# Altium PCB ESC_4in1_8layer.PcbDoc (part 1 of 2)
Units mm, origin at the board's own origin, x right, y up, seen from the top; angles counter-clockwise.
Board outline 33 x 33 mm, 8 copper layers (Top Layer, VBAT 1, Signal 1, GND 1, VBAT 2, Signal 2, GND 2, Bottom Layer), stack 1.028 mm thick; 215 components, 149 nets, 833 pads, 210 vias.
Unrouted connection lines stored in the file: 316.
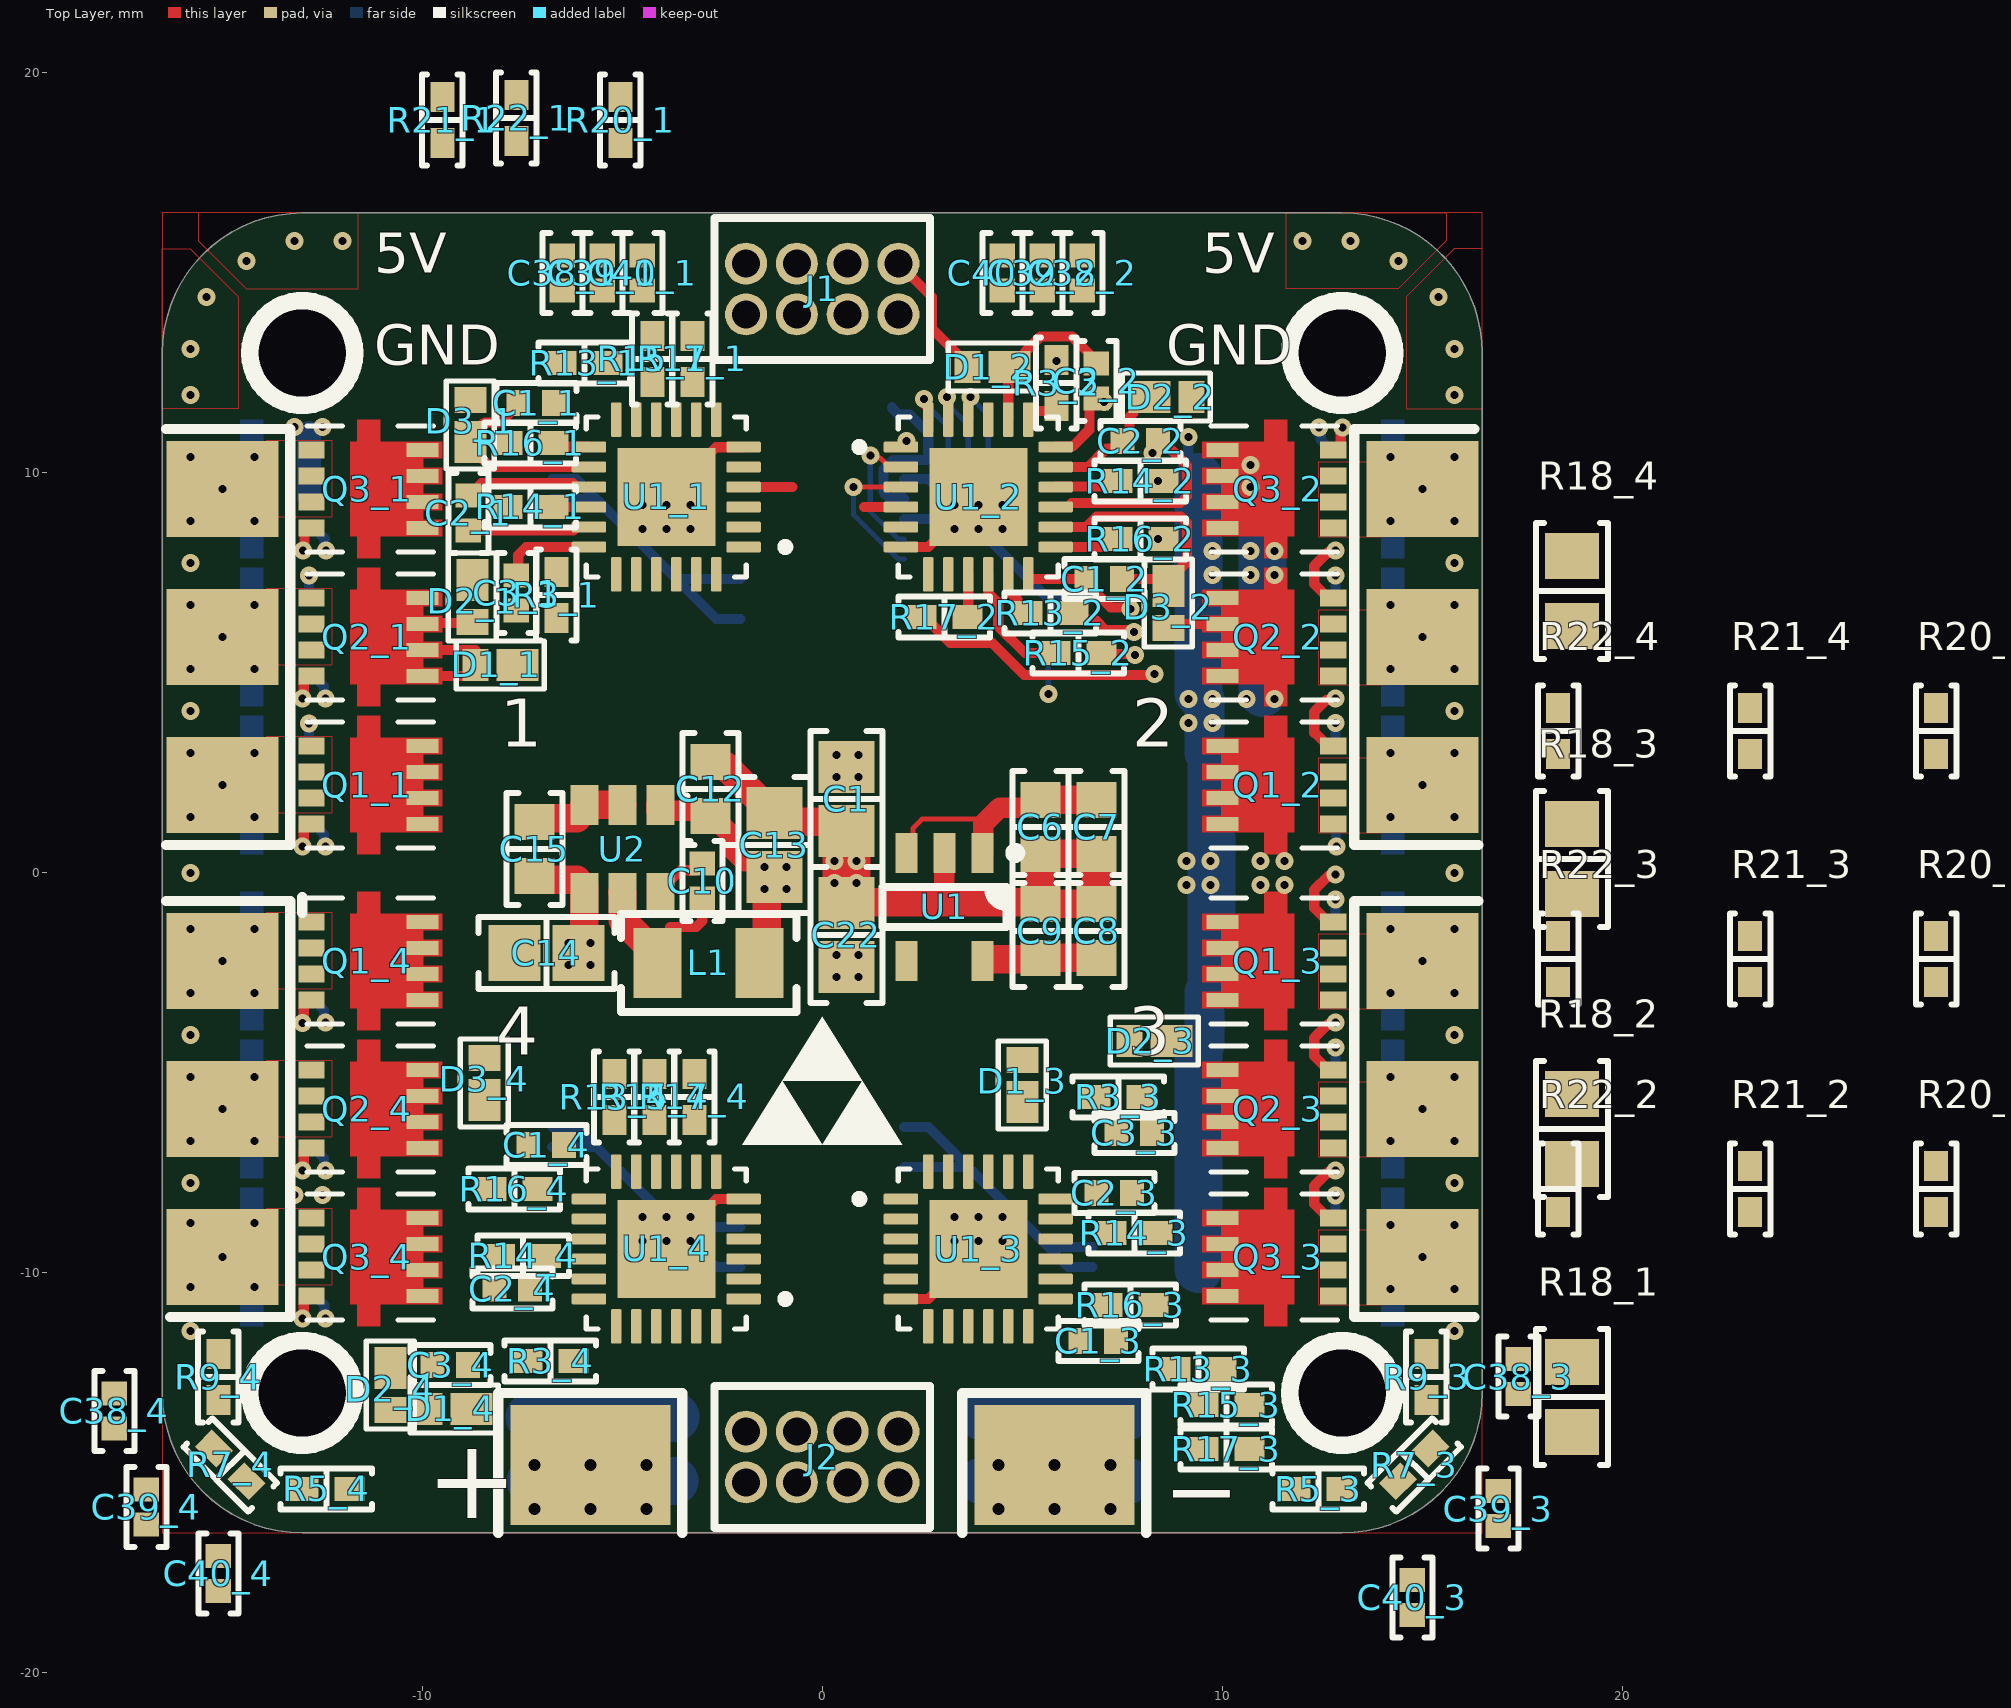
[diagram p0: Top Layer view]
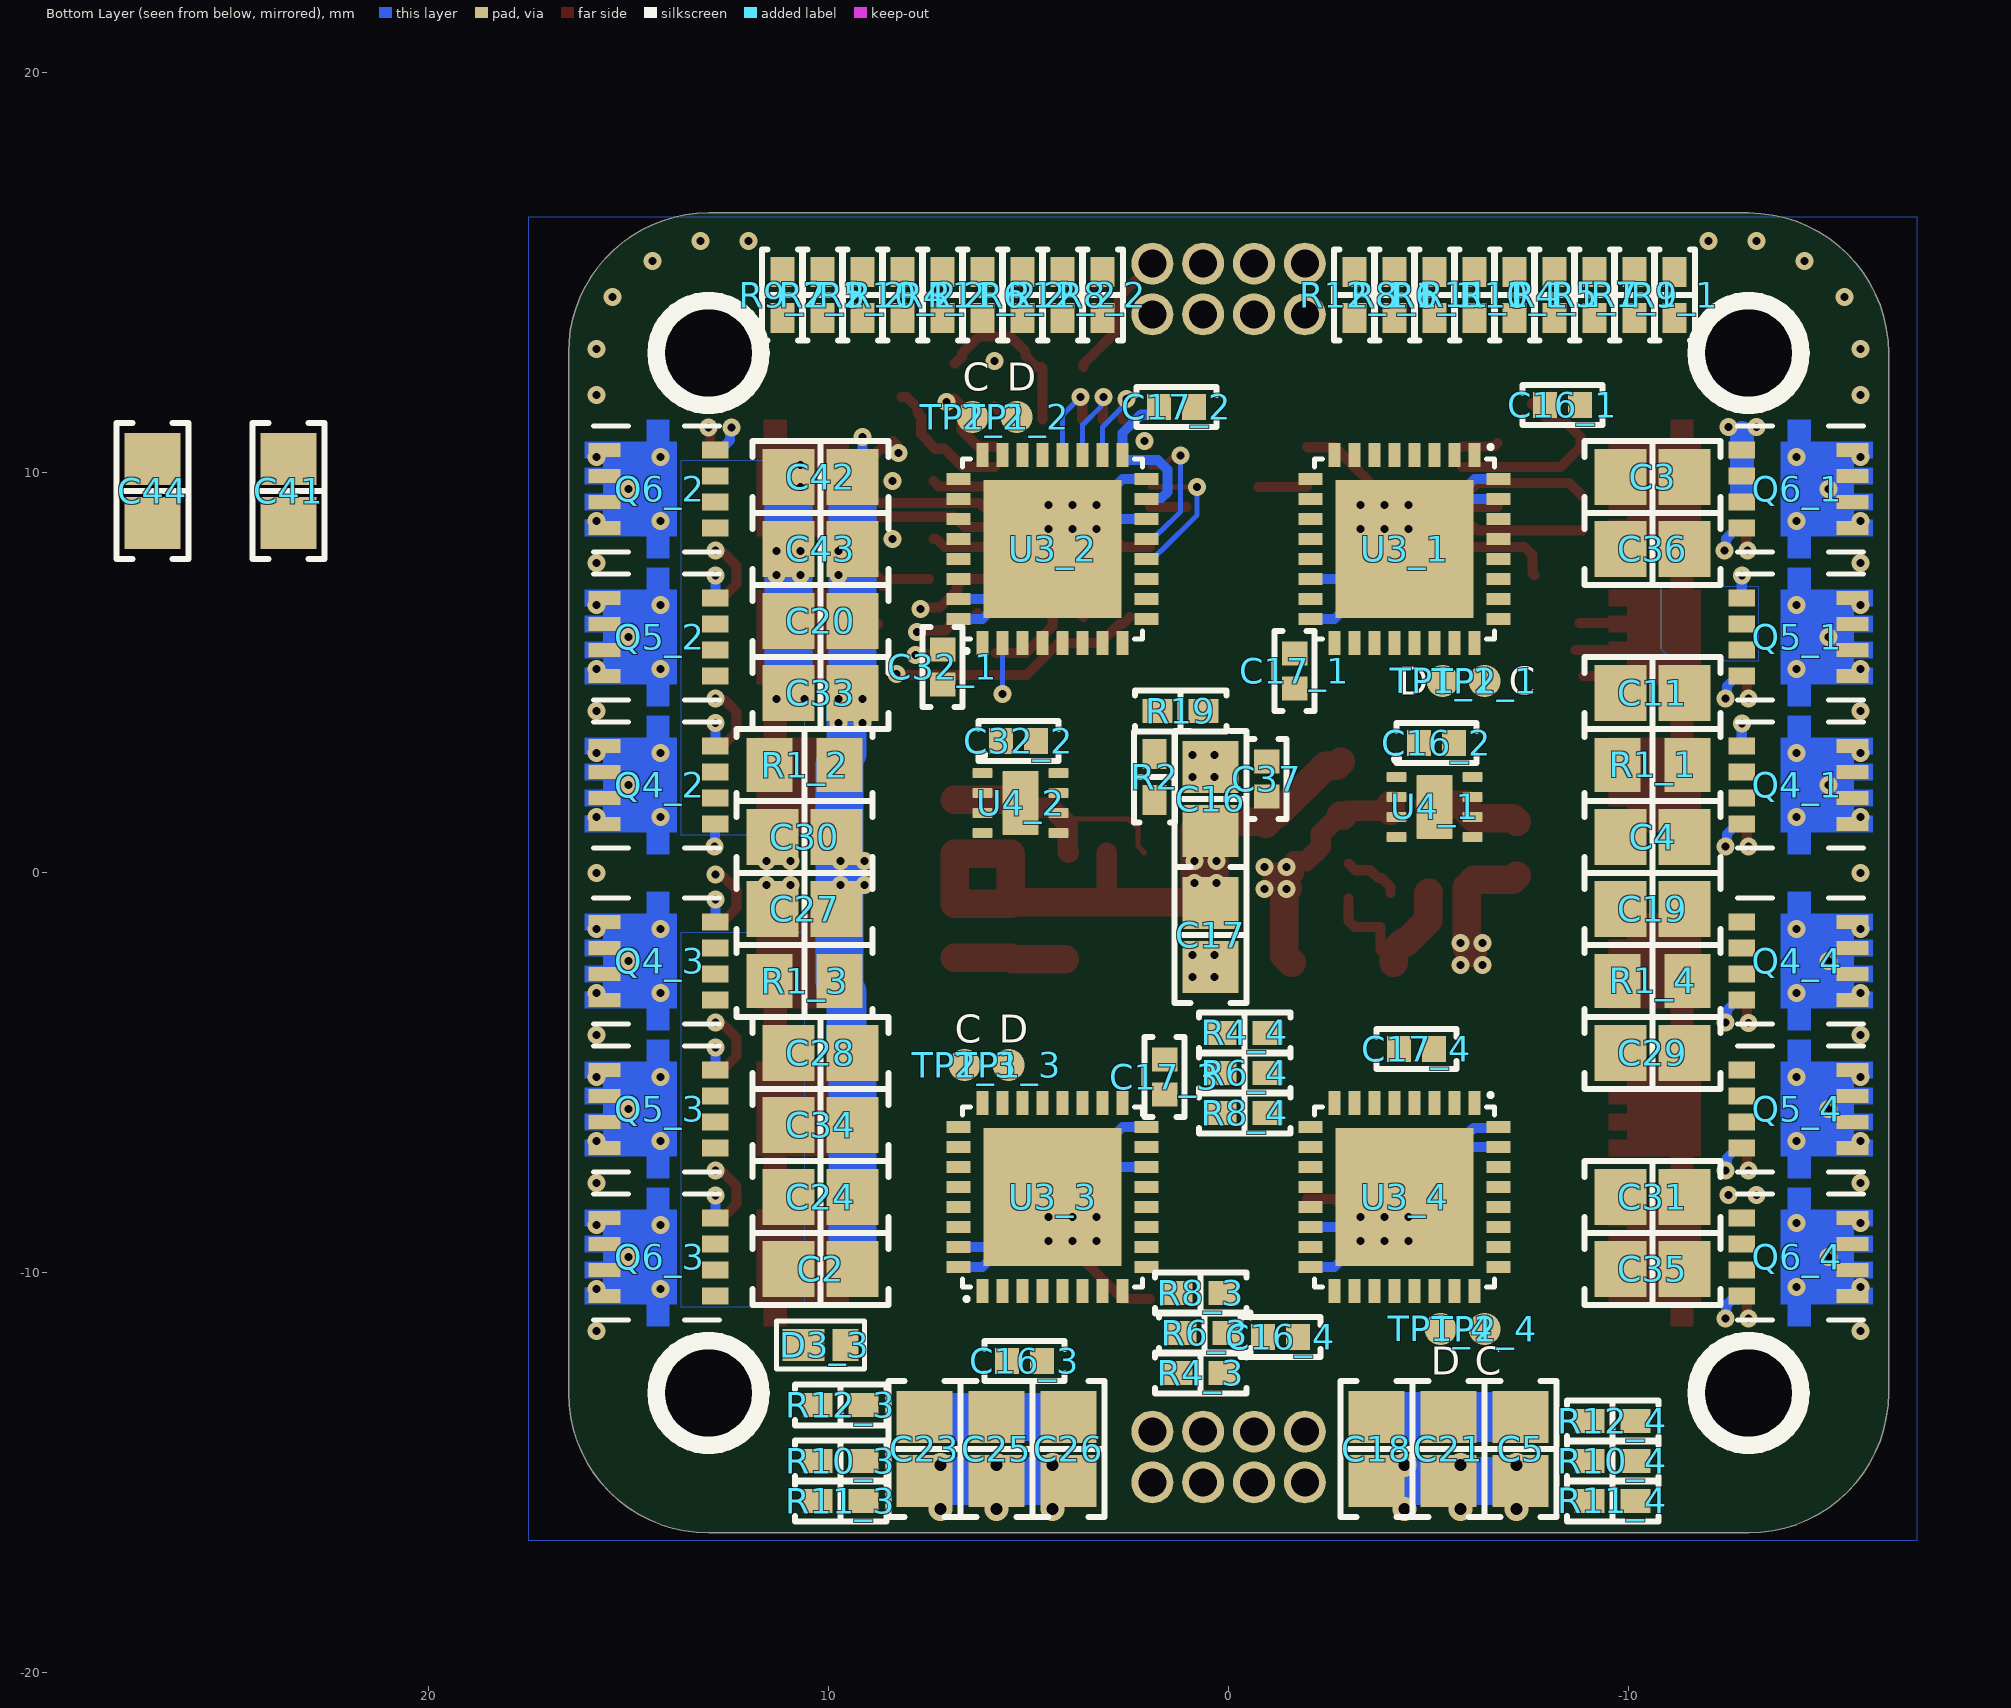
[diagram p1: Bottom Layer view, seen from below]
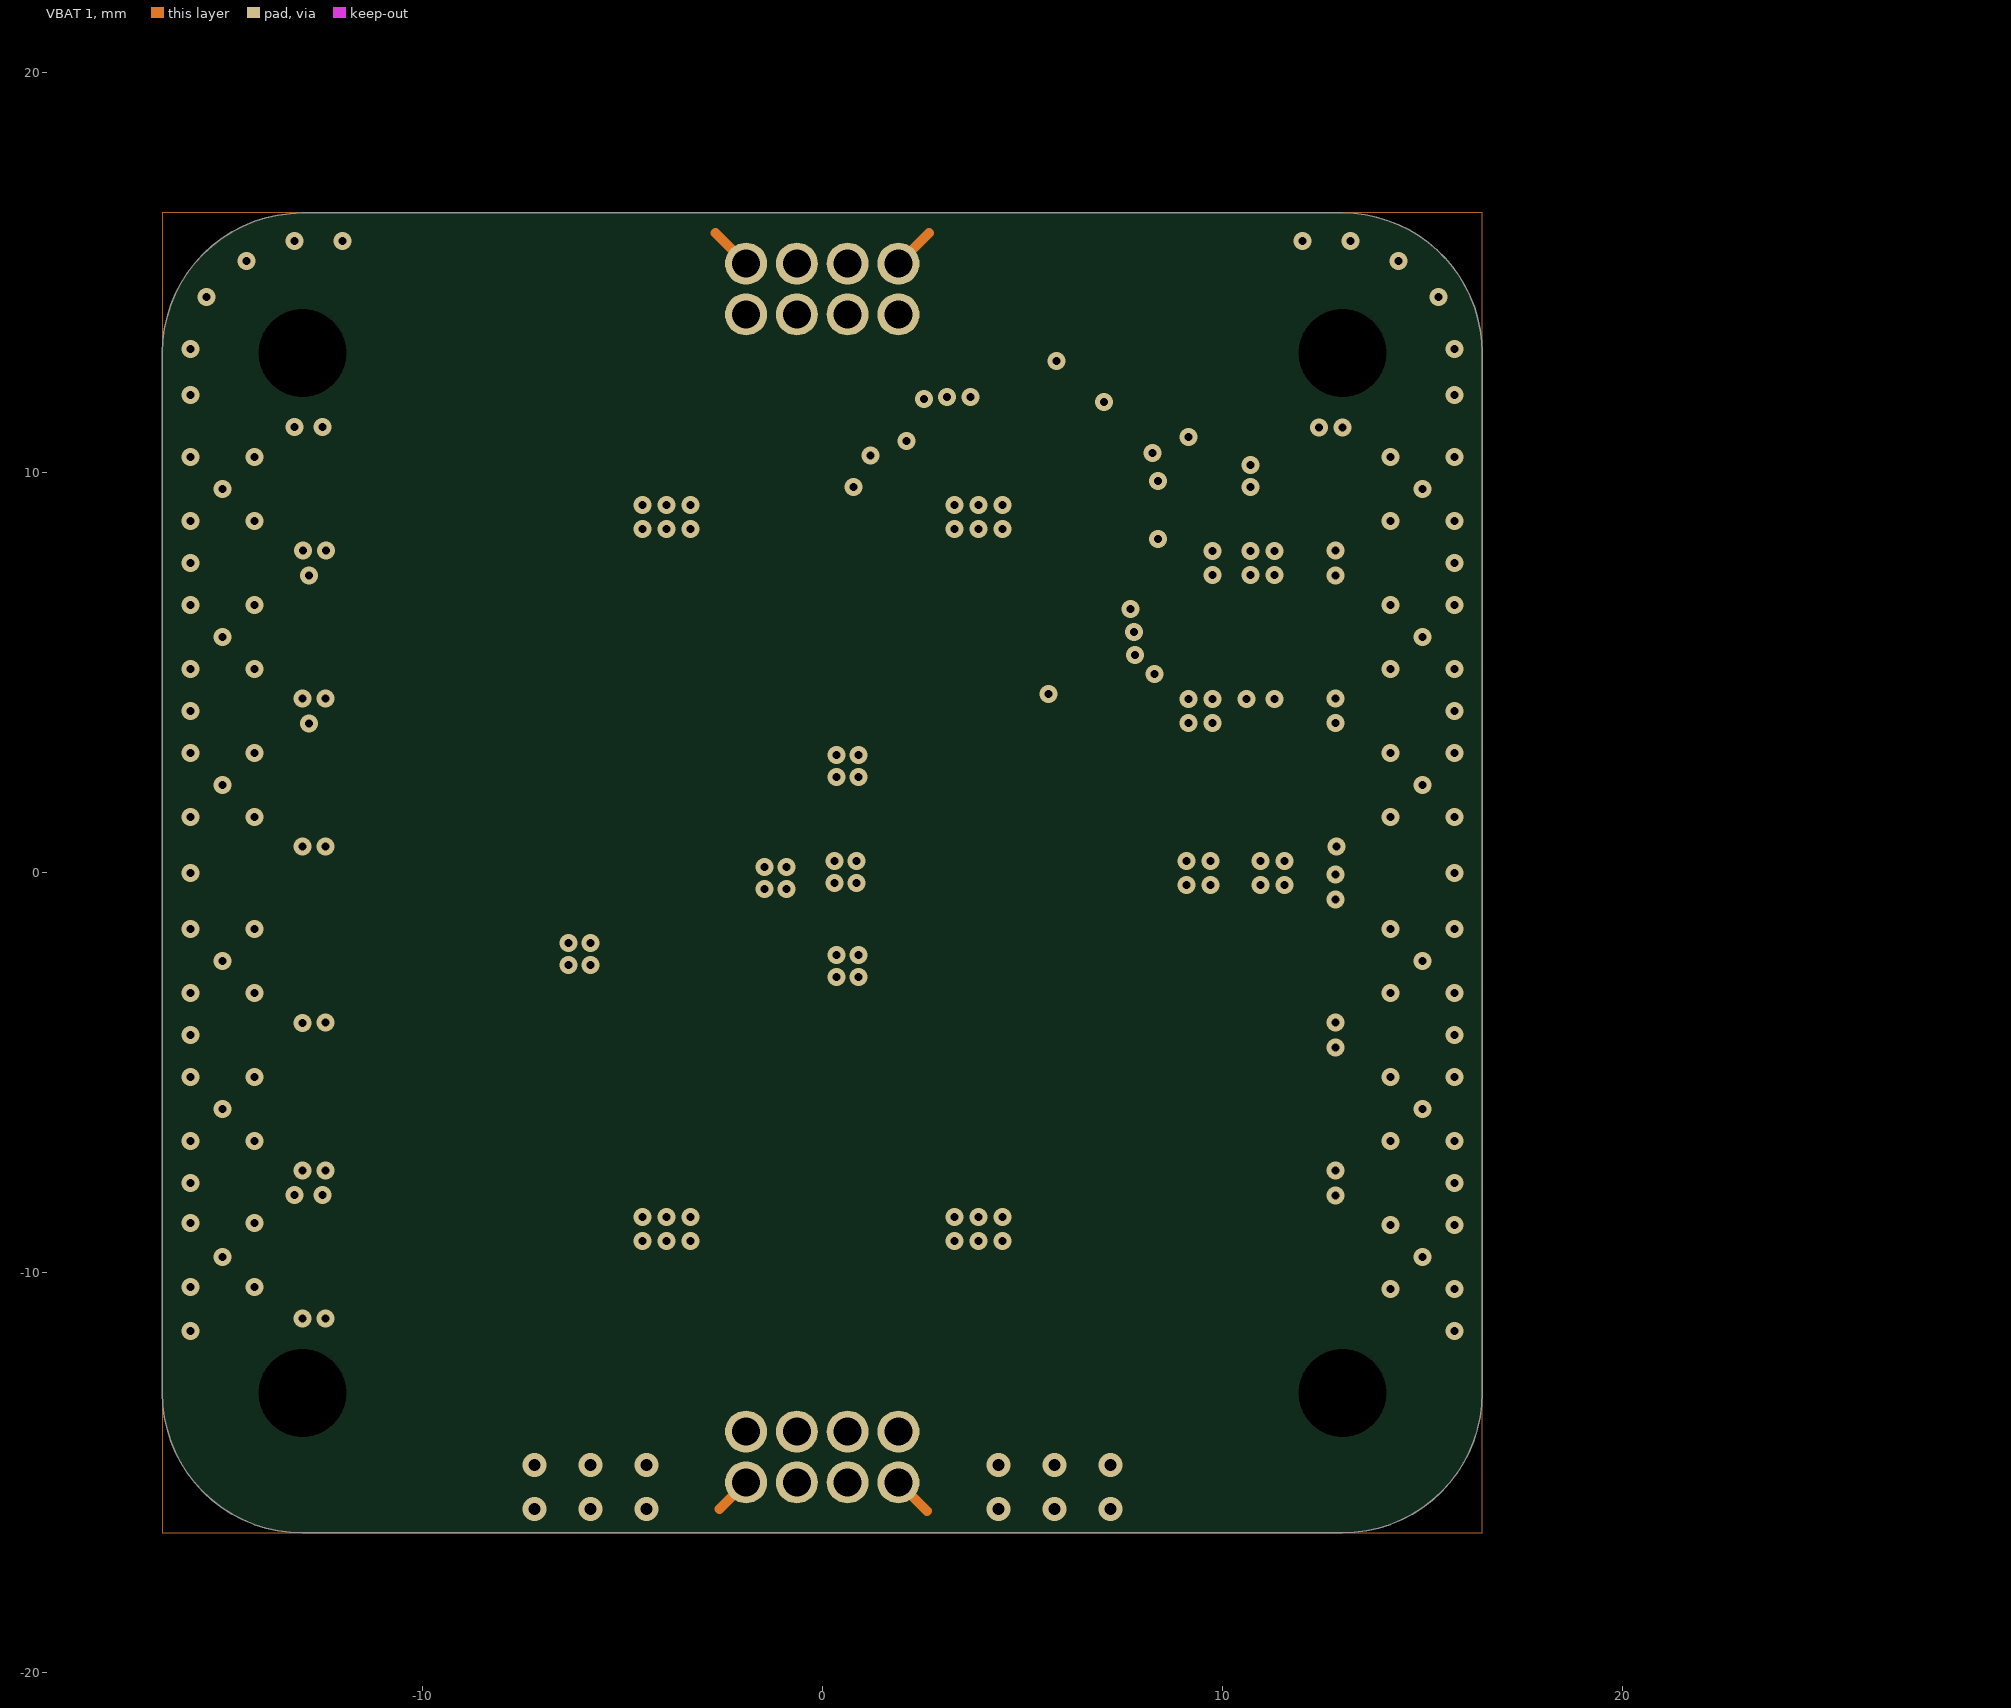
[diagram p2: VBAT 1]
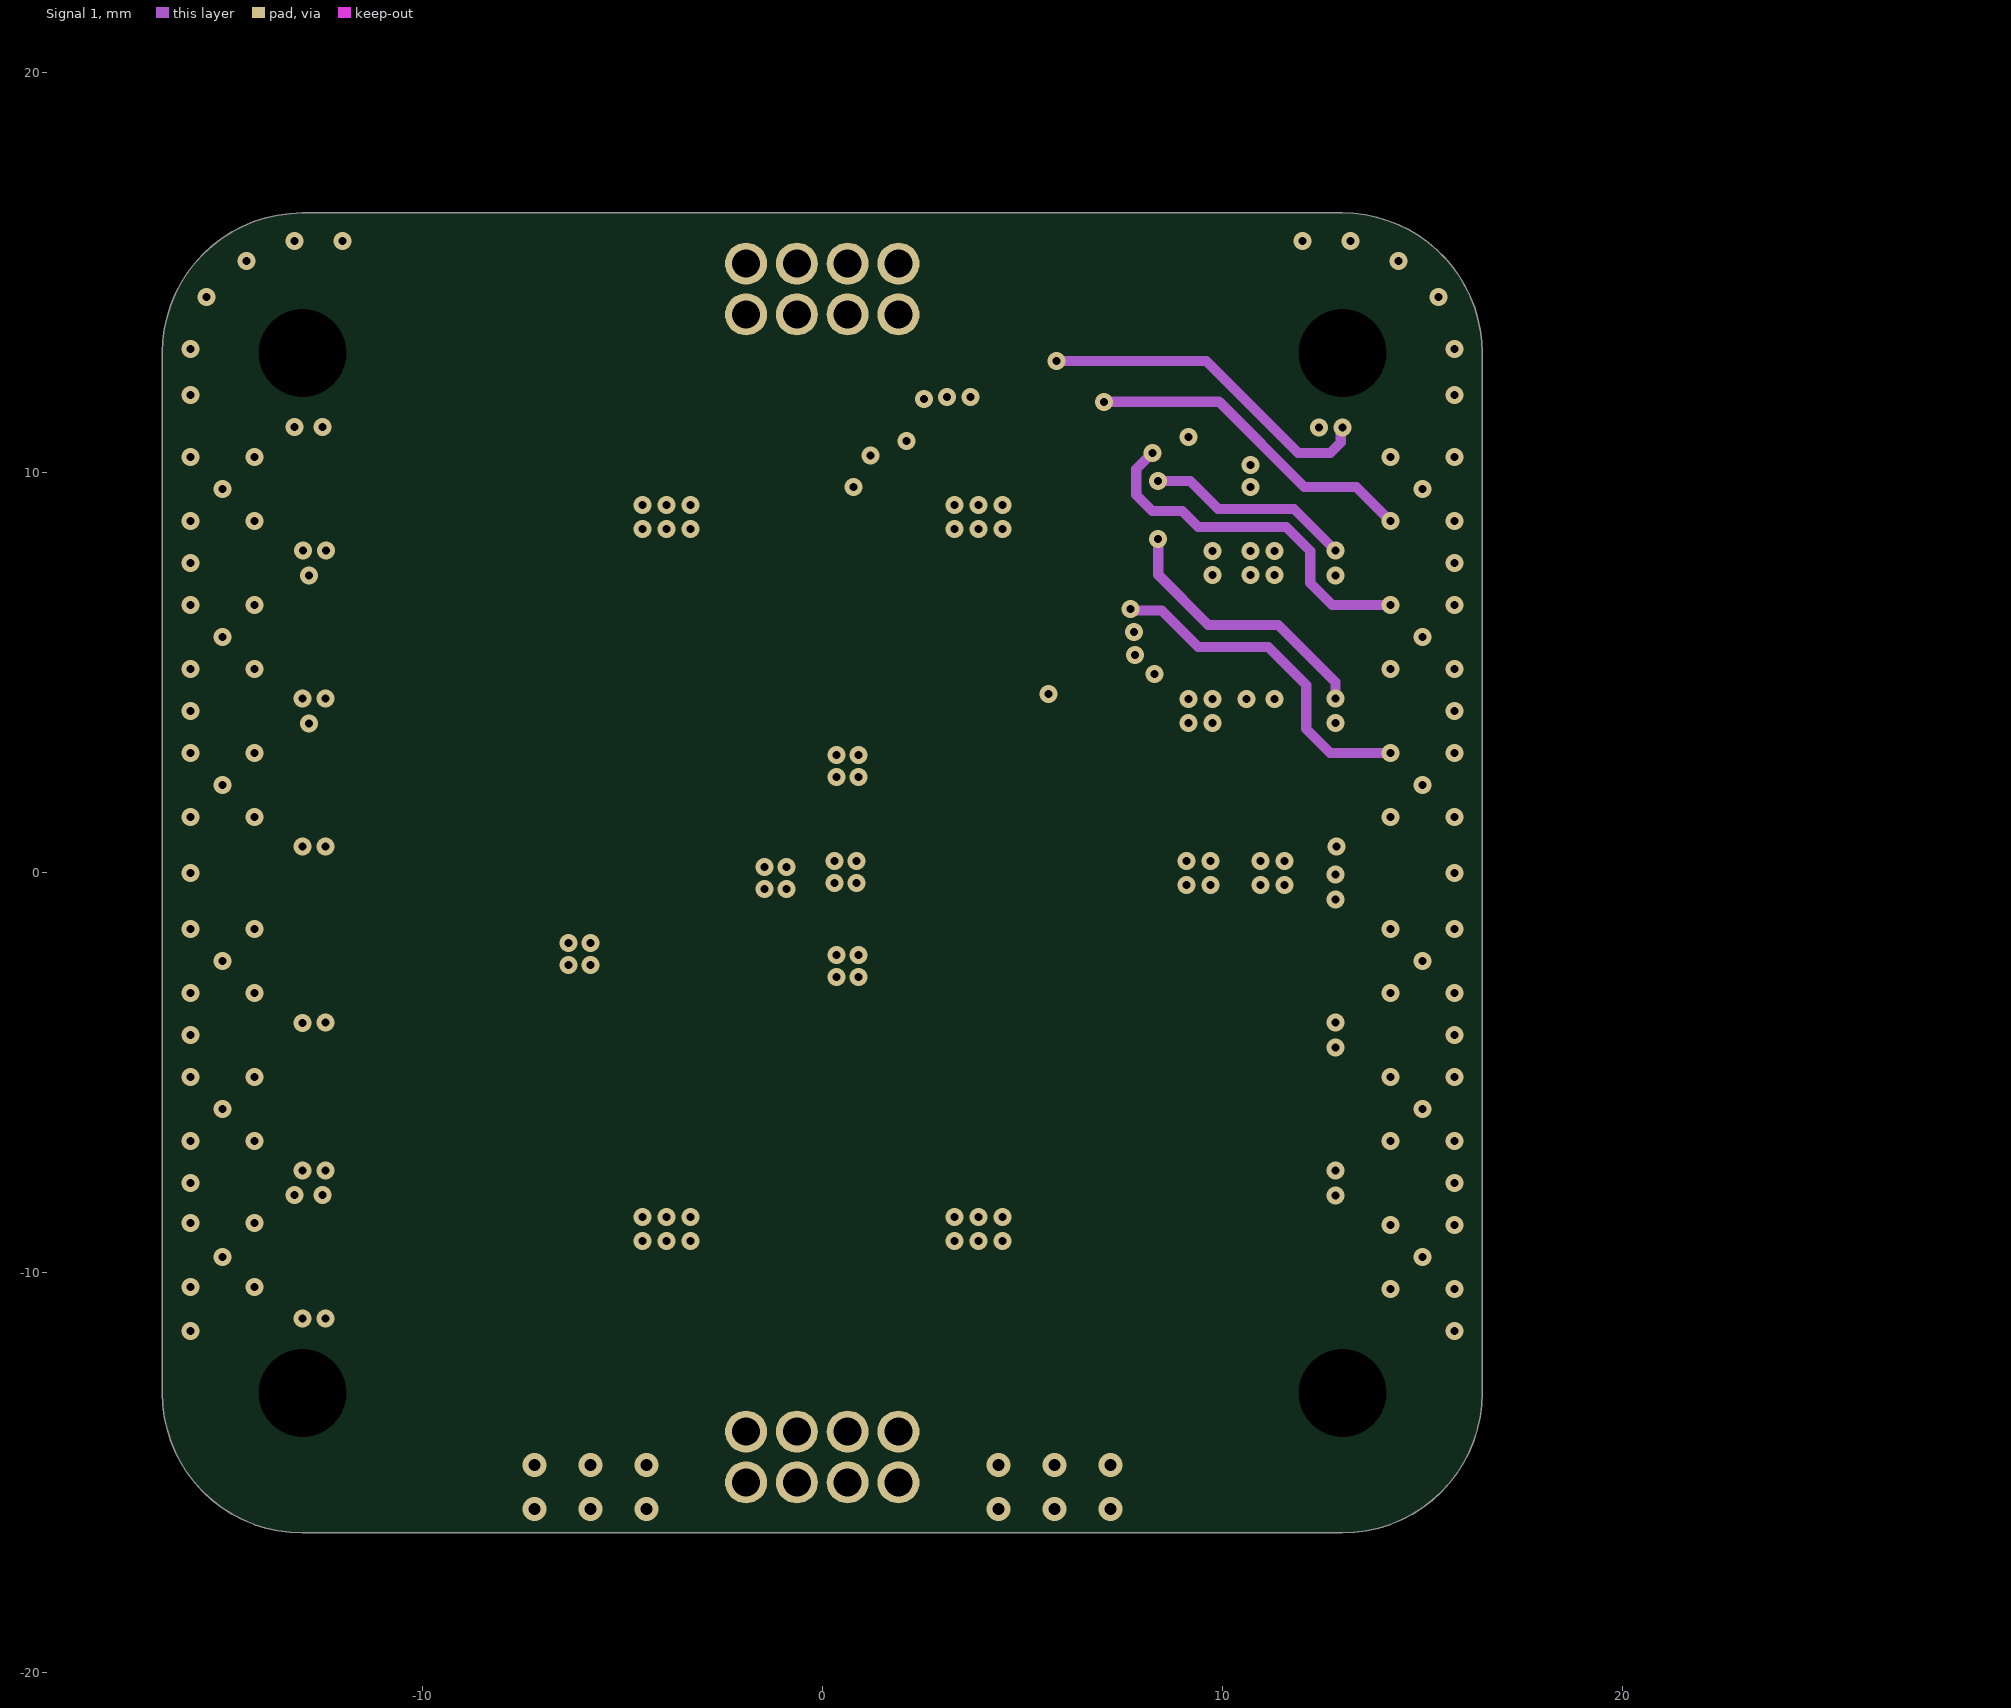
[diagram p3: Signal 1]
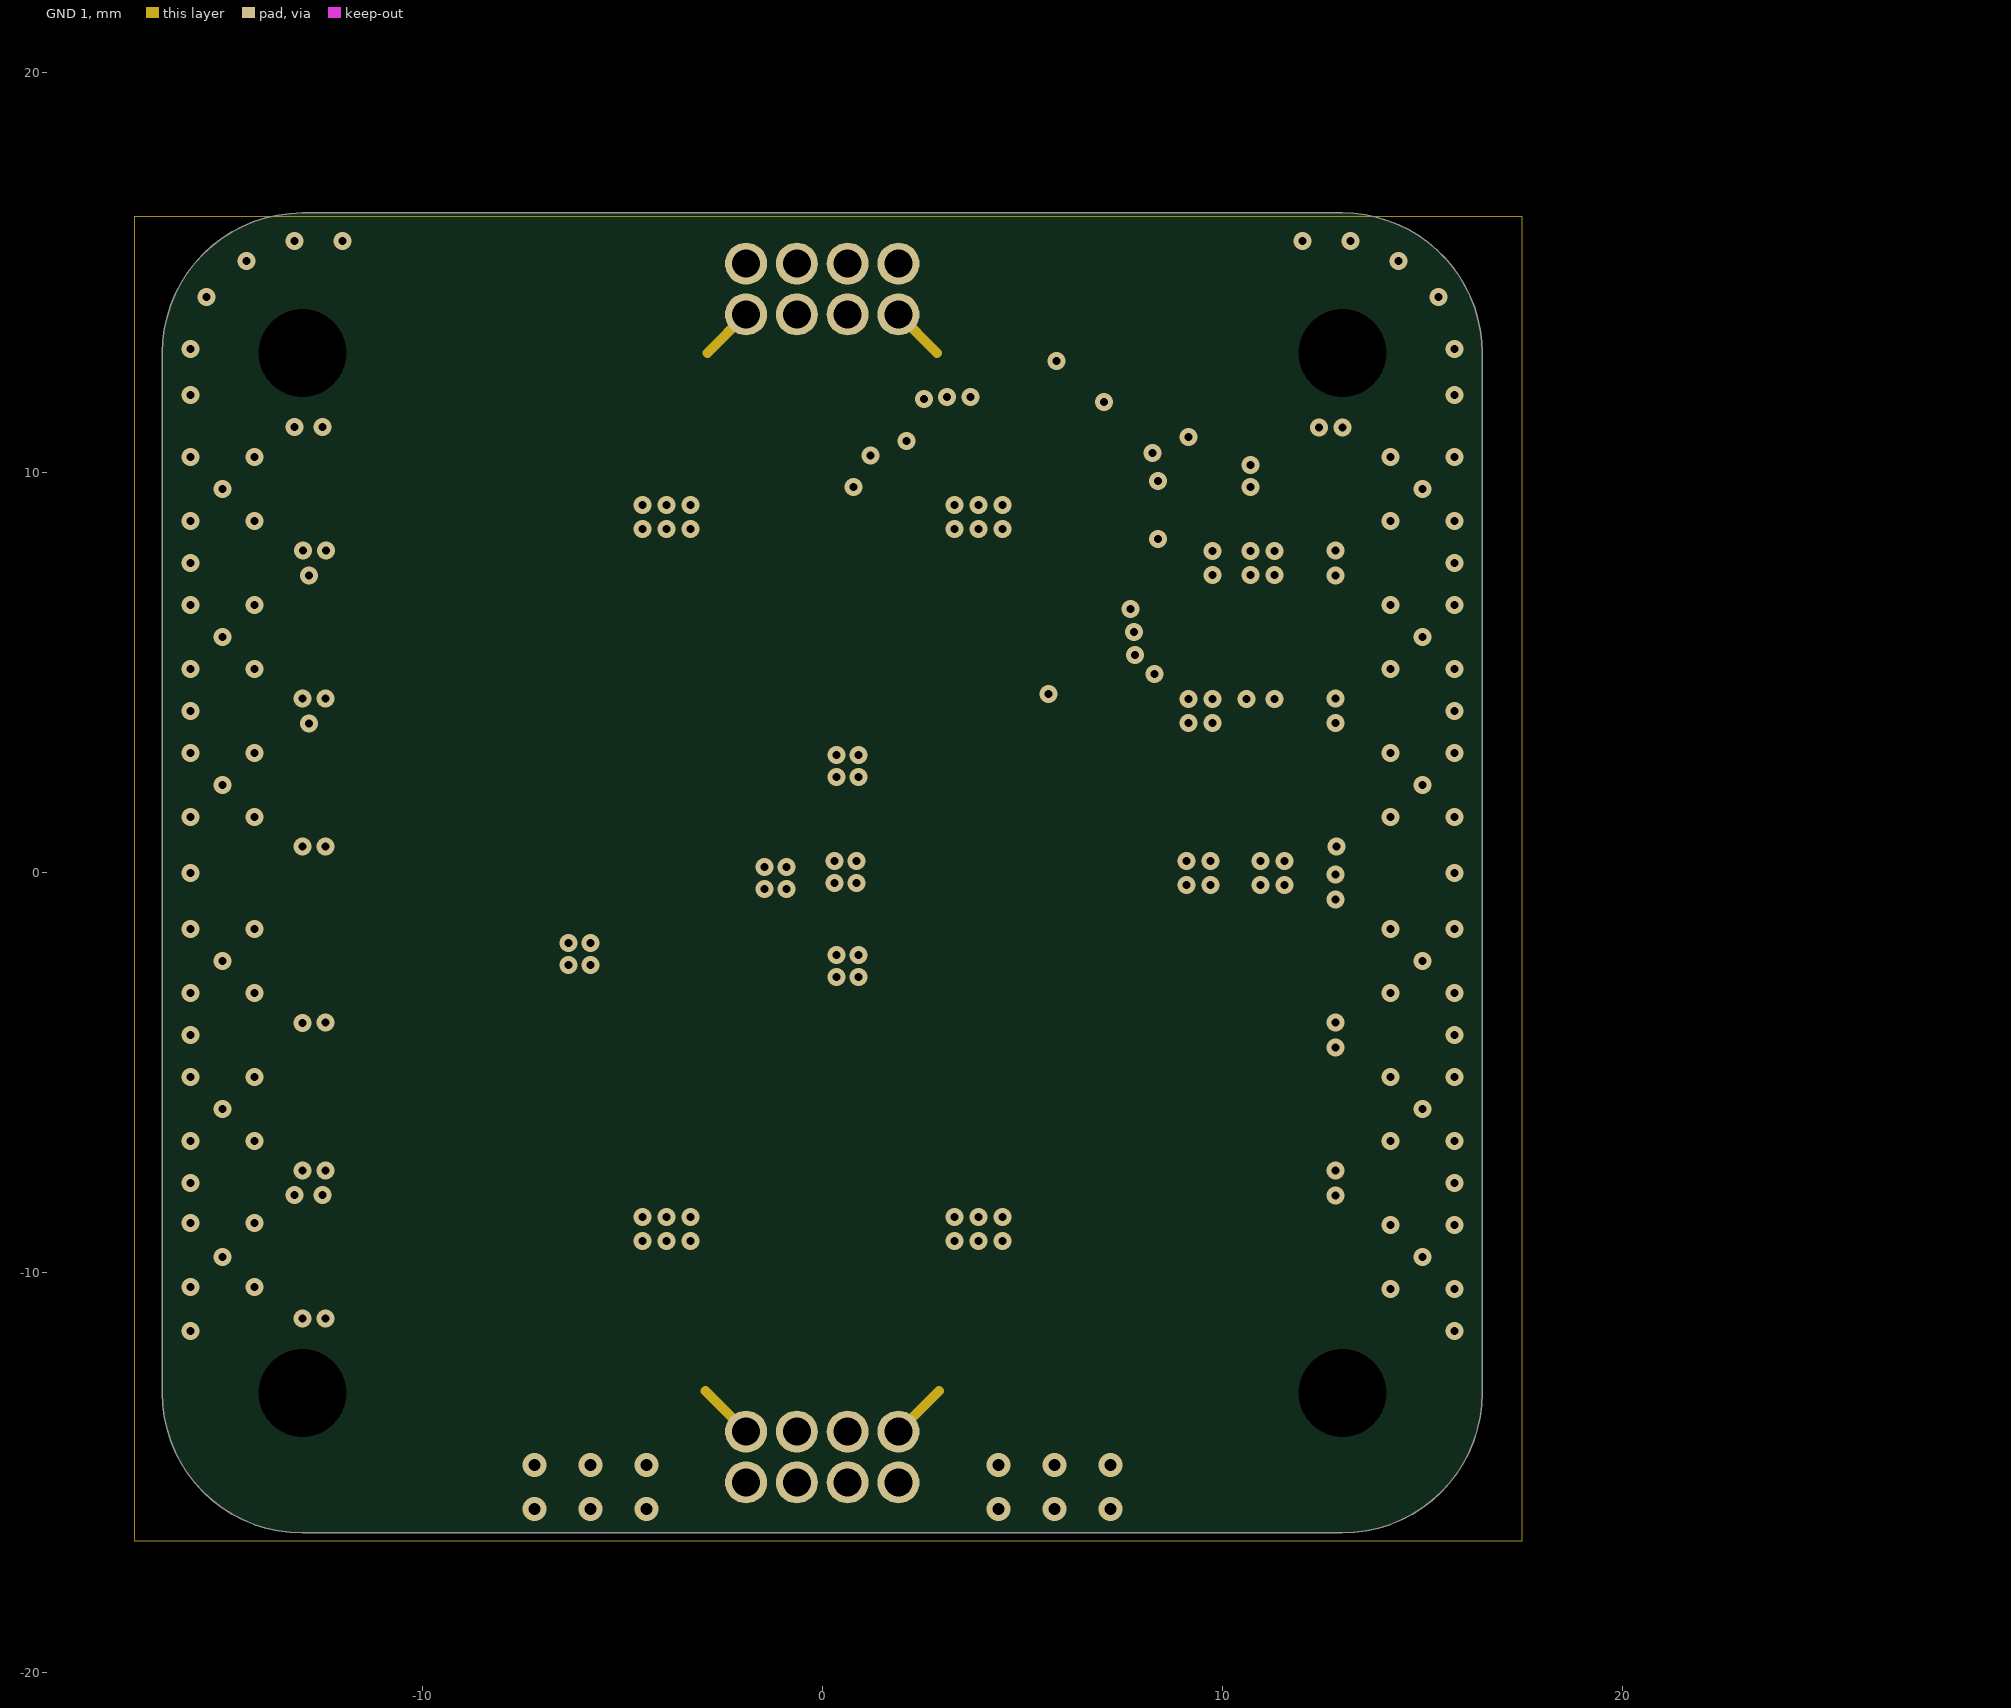
[diagram p4: GND 1]
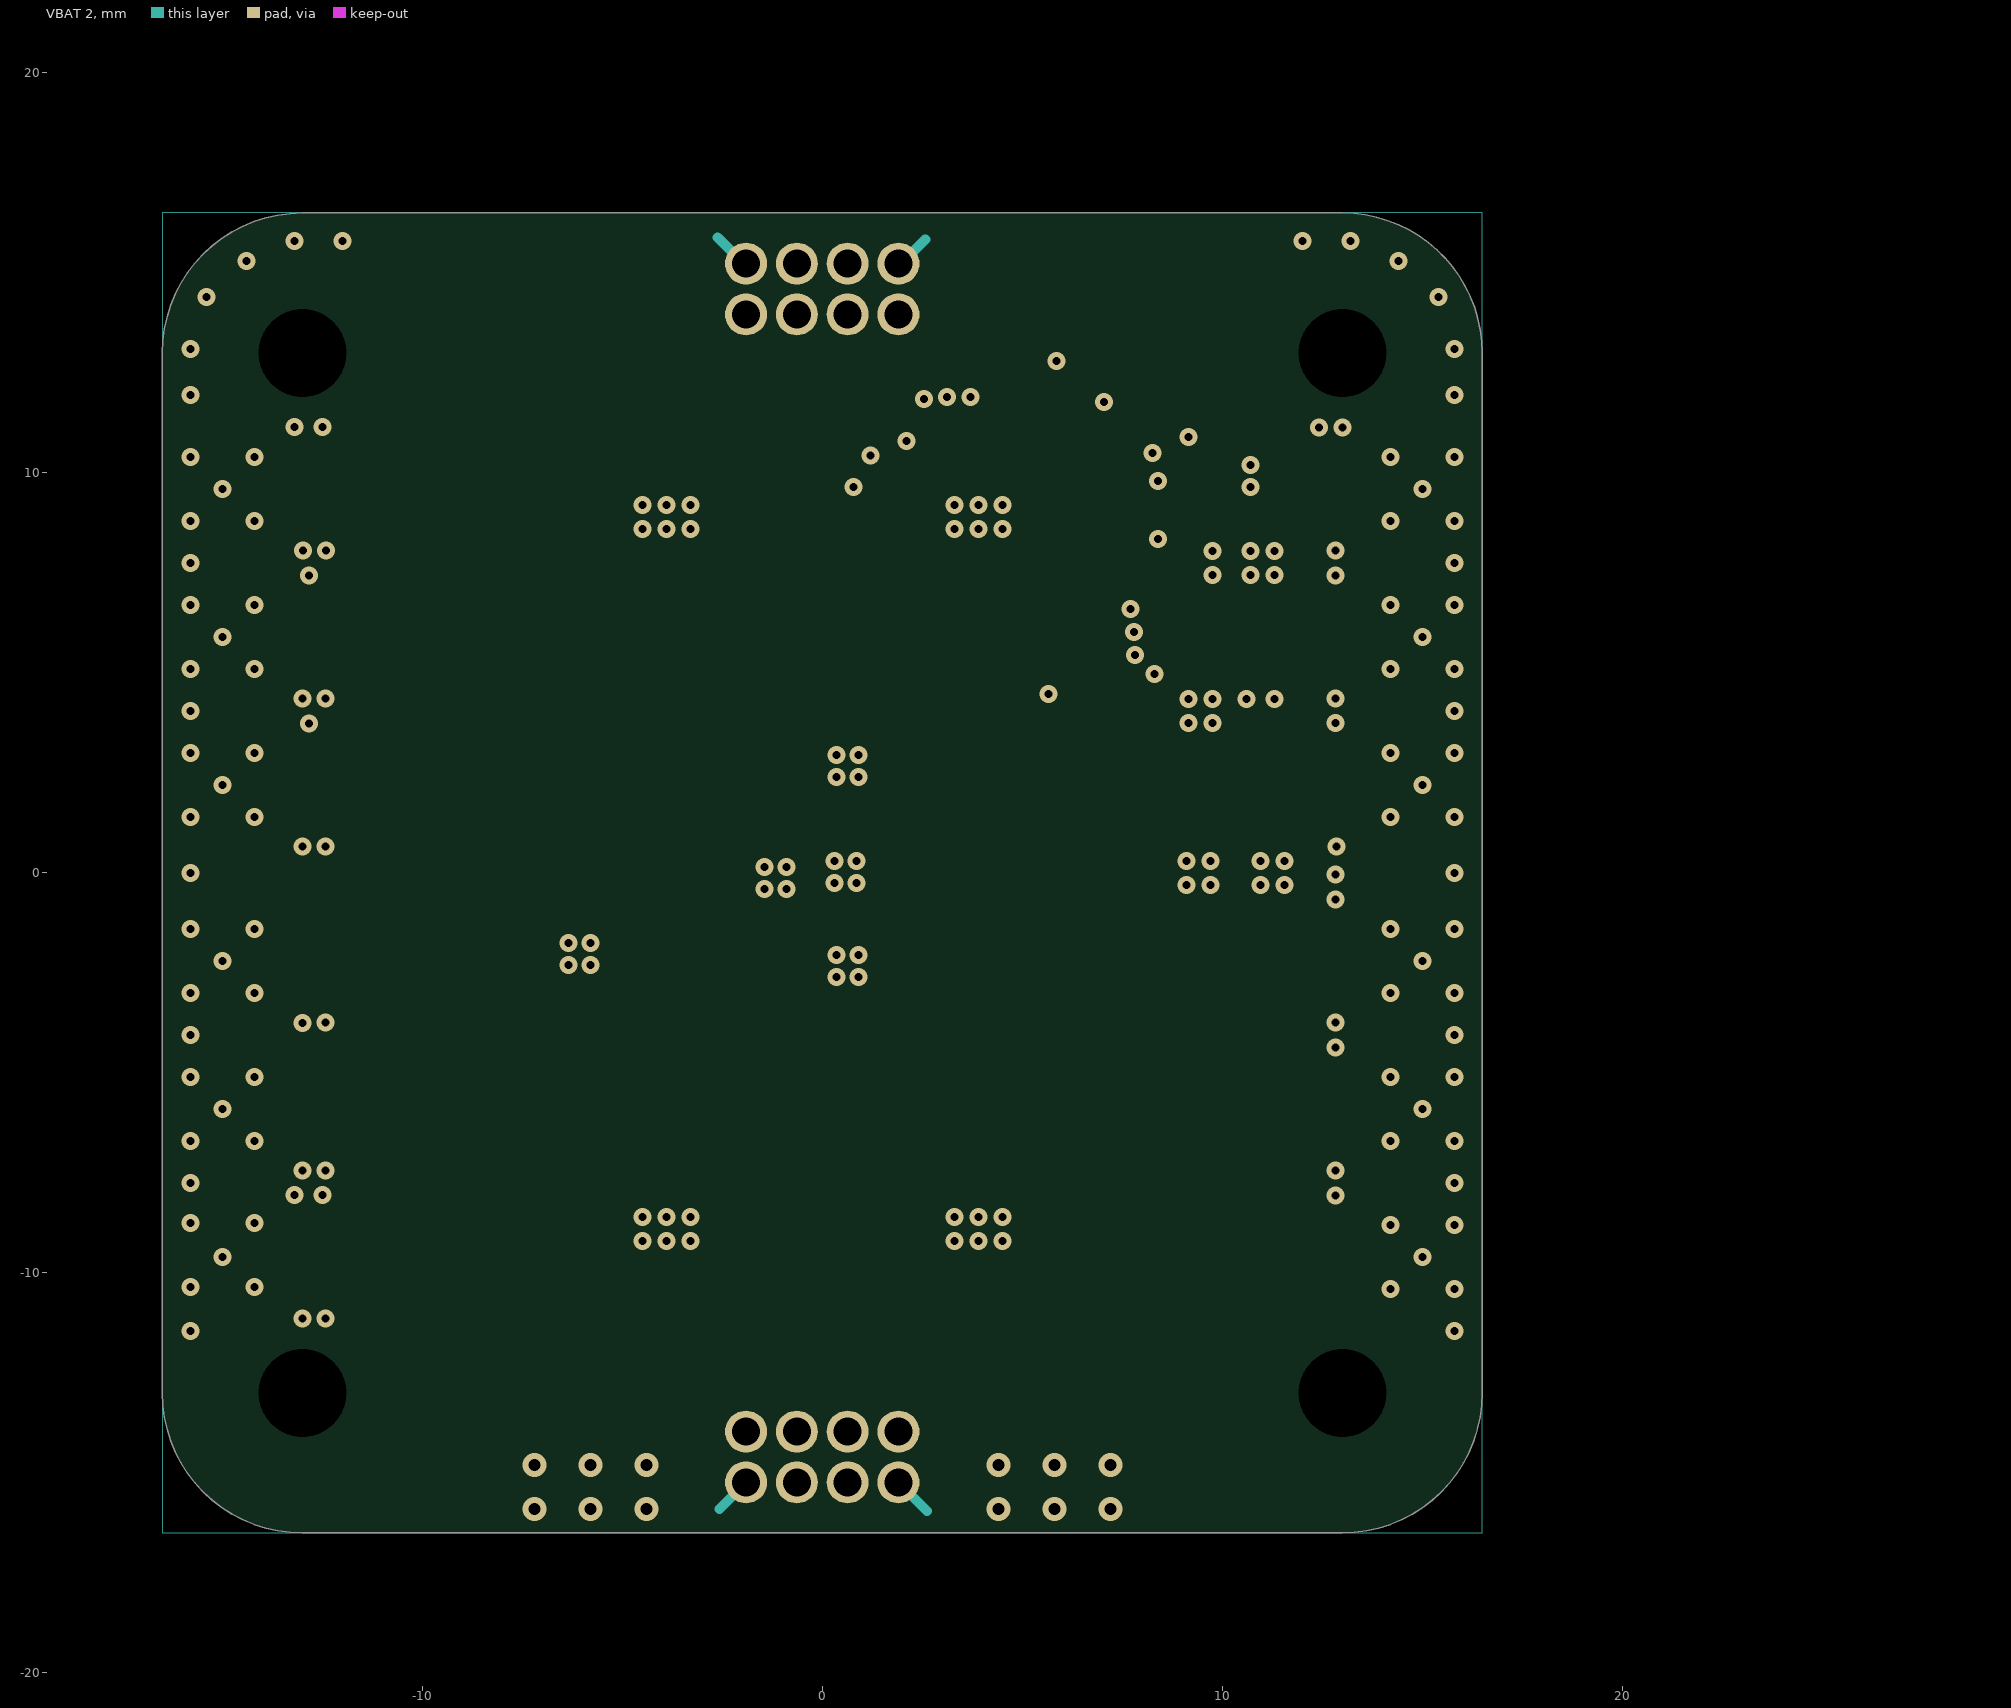
[diagram p5: VBAT 2]
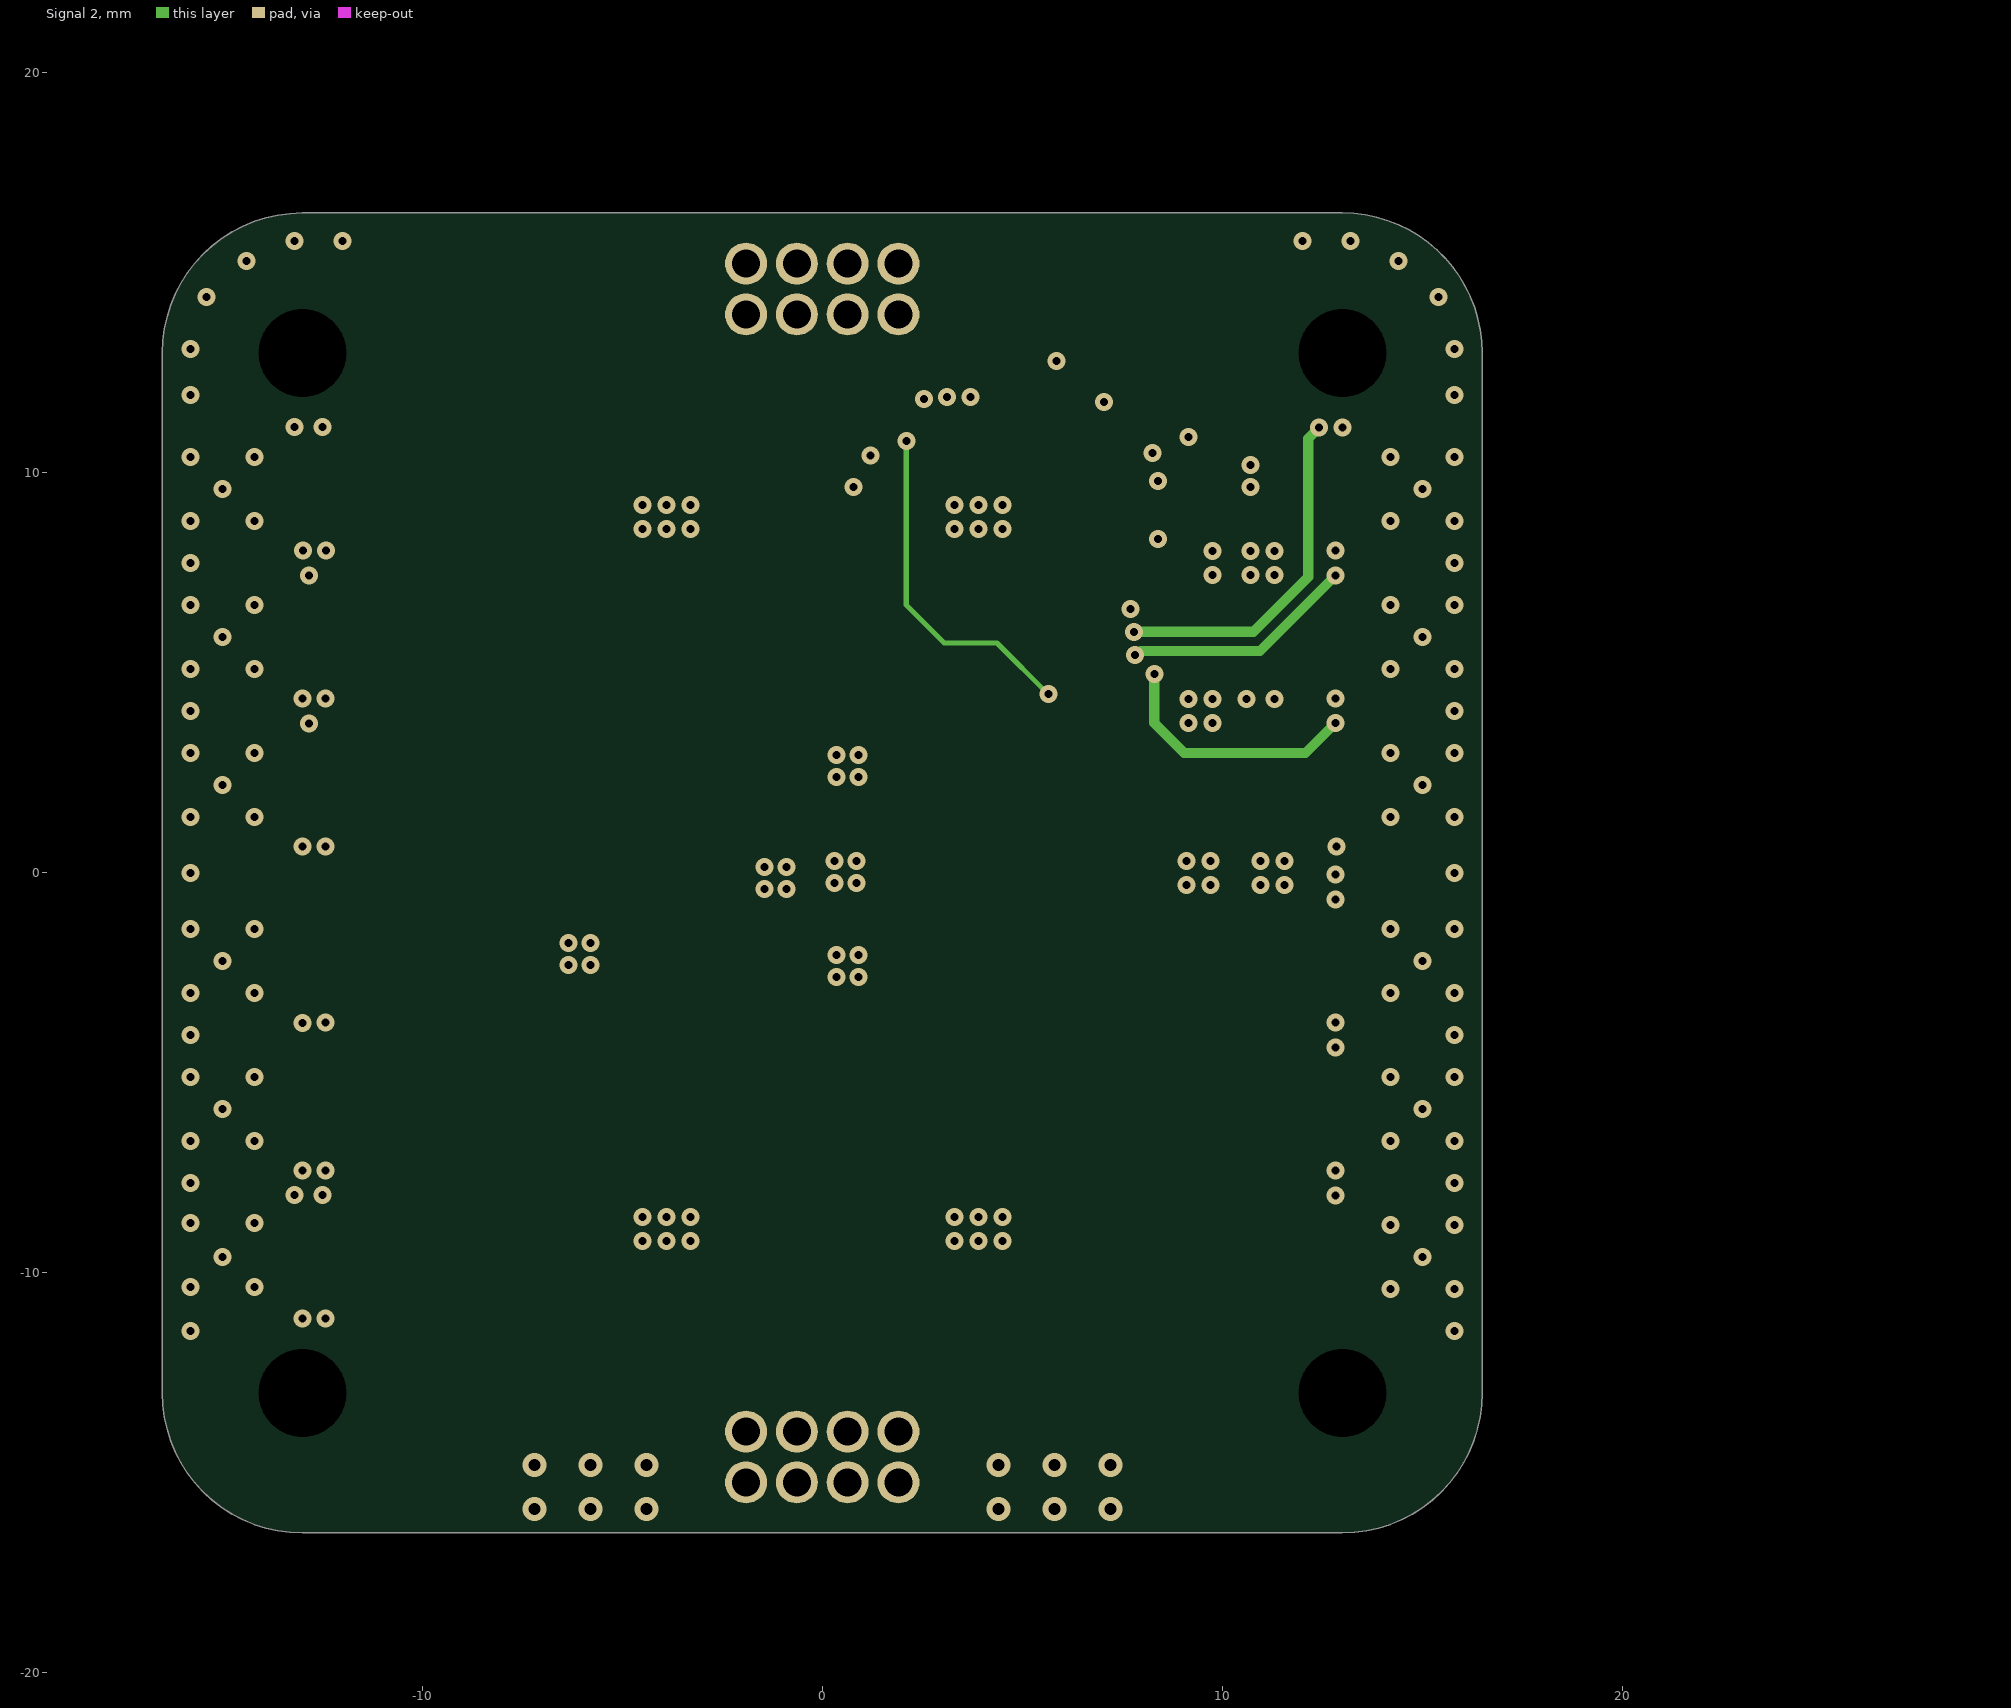
[diagram p6: Signal 2]
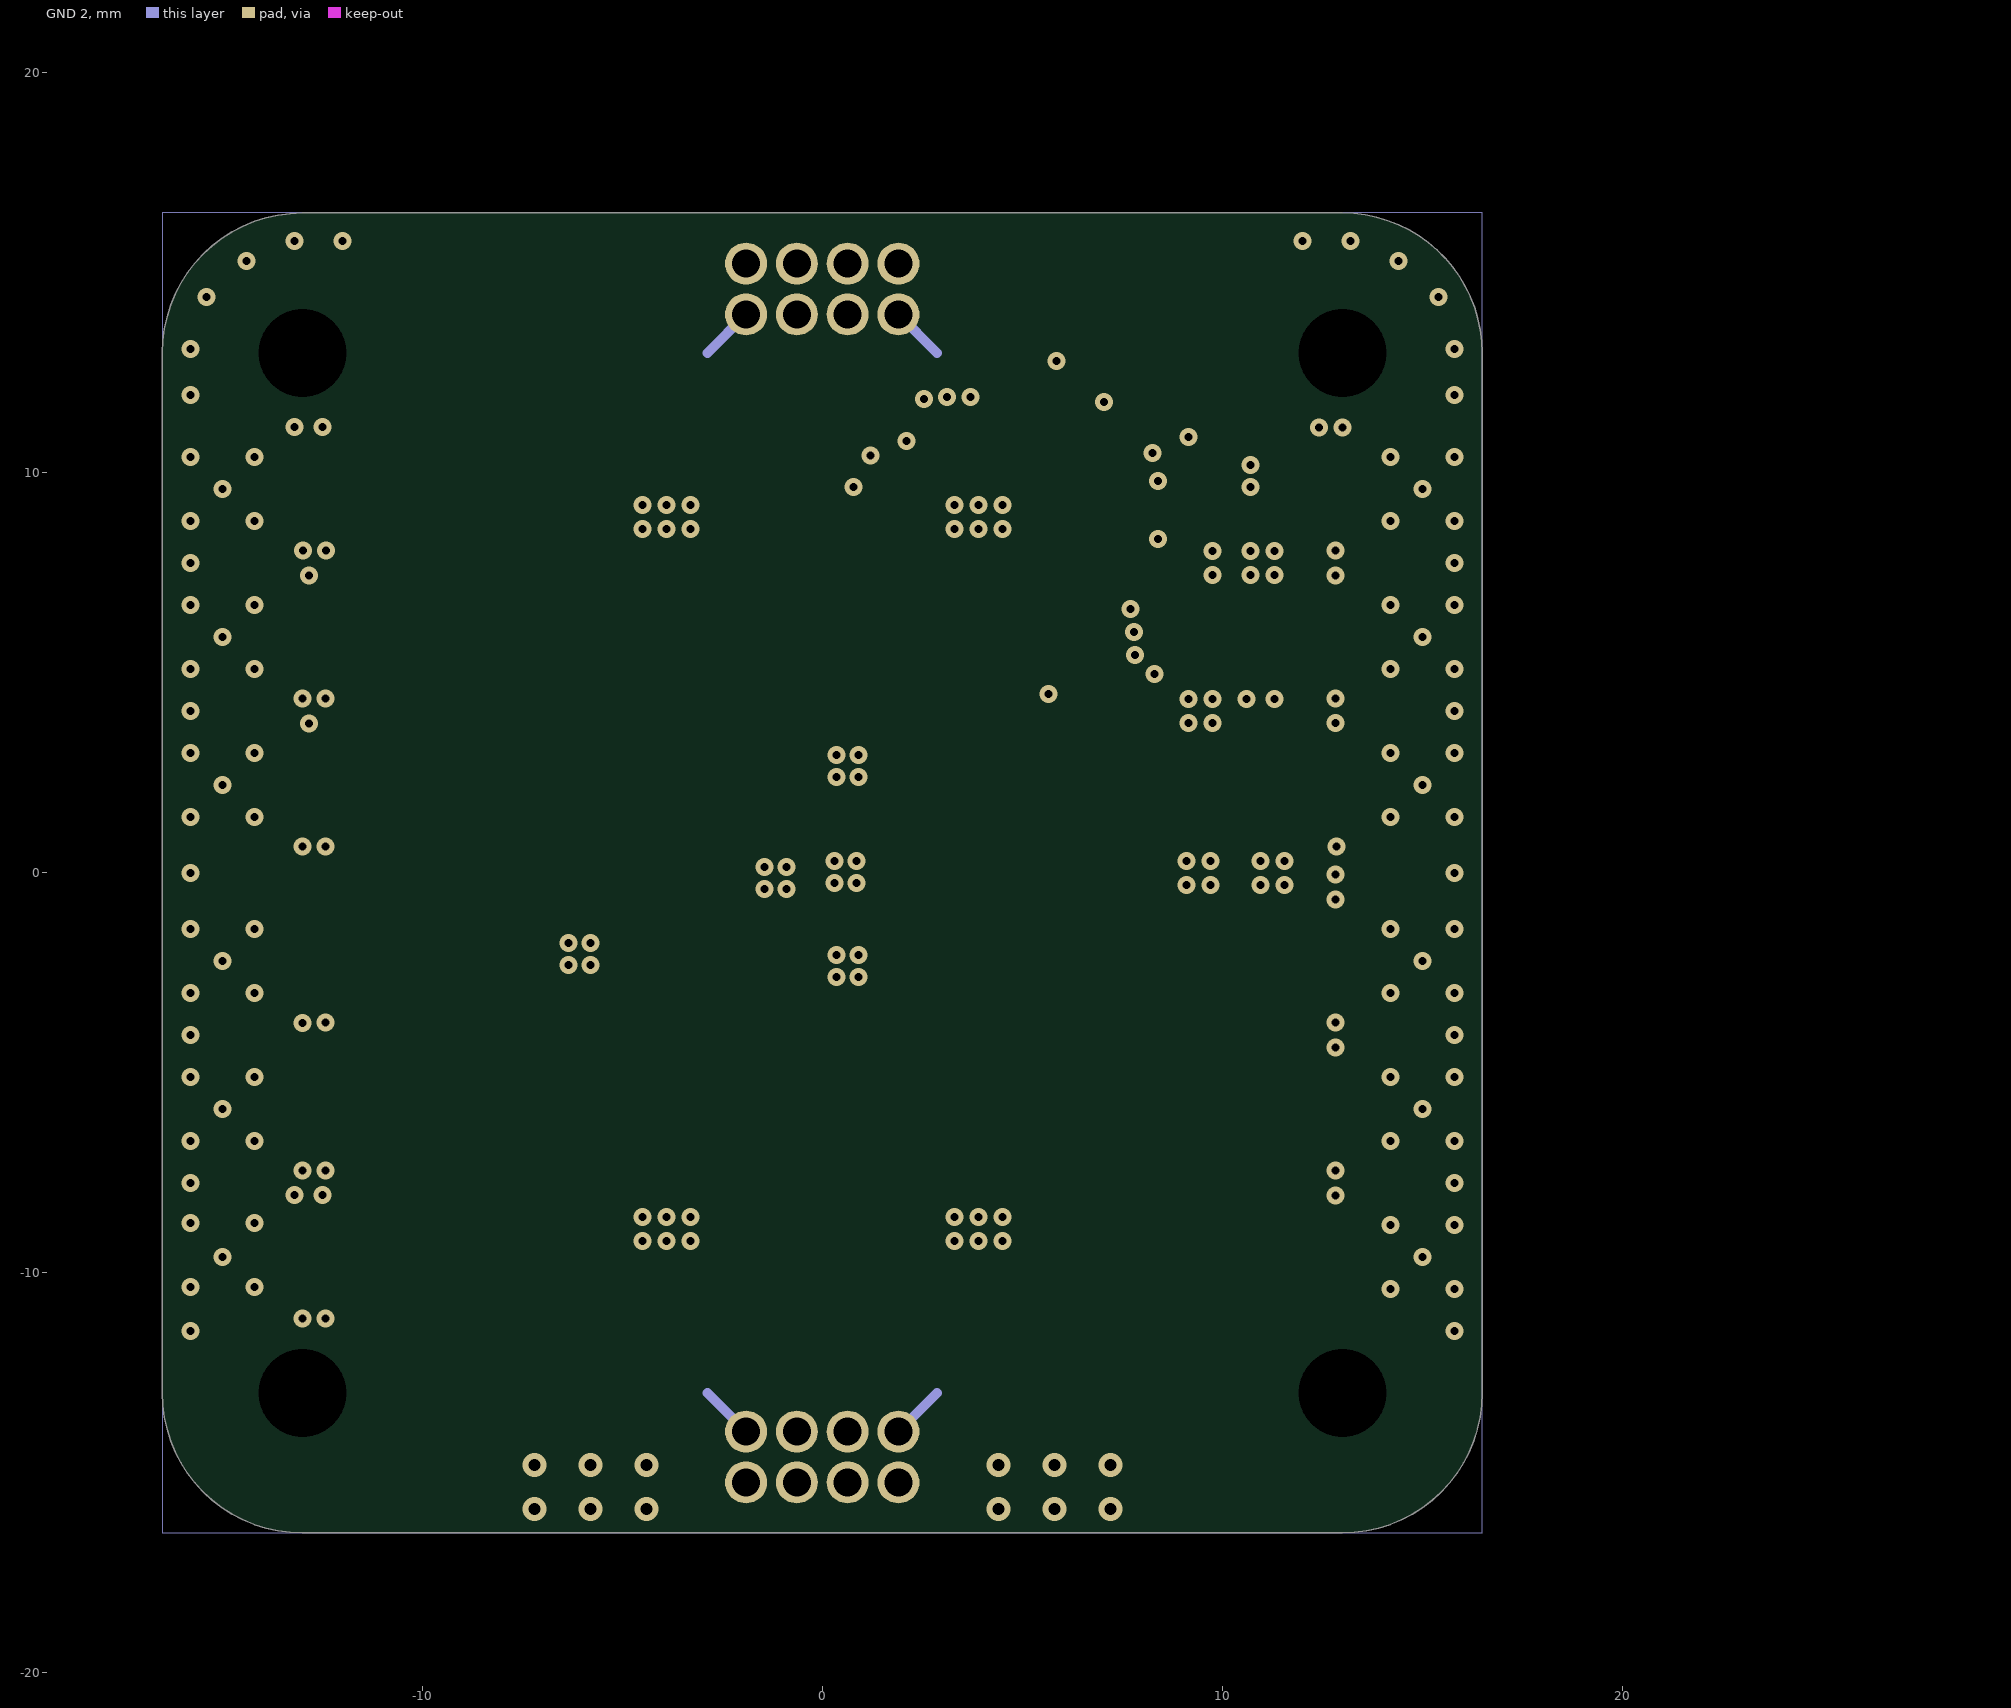
[diagram p7: GND 2]

## Layer stack, top to bottom
Top Solder: solder mask 0.0102, Solder Resist, Dk 3.5
Top Layer: signal copper 0.0356
Dielectric 4: prepreg 0.0711, PP-006, Dk 4.1
VBAT 1: signal copper 0.035
Dielectric 2: prepreg 0.0711, PP-006, Dk 4.1
Signal 1: signal copper 0.035
Dielectric 6: prepreg 0.0711, PP-006, Dk 4.1
GND 1: signal copper 0.035
Dielectric 1: dielectric 0.32, FR-4, Dk 4.8
VBAT 2: signal copper 0.035
Dielectric 7: prepreg 0.0711, PP-006, Dk 4.1
Signal 2: signal copper 0.035
Dielectric 3: prepreg 0.0711, PP-006, Dk 4.1
GND 2: signal copper 0.035
Dielectric 5: prepreg 0.0711, PP-006, Dk 4.1
Bottom Layer: signal copper 0.0356
Bottom Solder: solder mask 0.0102, Solder Resist, Dk 3.5

## Board outline
-16.5,-13 -16.5,13 cw(c-13,13) -13,16.5 13,16.5 cw(c13,13) 16.5,13 16.5,-13 cw(c13,-13) 13,-16.5 -13,-16.5 cw(c-13,-13)

## Design rules (kind name [scope] priority, off if disabled: settings)
BoardOutlineClearance [All] p1: gap=0.2 ignorepadtopadclearanceinfootprint=FALSE
Clearance "PolyGon Pour Clearance" [InPolyGon] p1: gap=0.12 ignorepadtopadclearanceinfootprint=FALSE
Clearance [All] p2: gap=0.089 ignorepadtopadclearanceinfootprint=TRUE except(0.127: Arc-Via Track-Via SMDPad-Via THPad-Via Via-Via Via-Fill Via-Poly Via-Region Via-Text; 0.25: Arc-Hole Track-Hole SMDPad-Hole THPad-Hole Via-Hole Fill-Hole Poly-Hole Region-Hole Text-Hole)
HoleSize [All] p1: absolutevalues=TRUE maxlimit=6.3 minlimit=0.2 maxpercent=80.000 minpercent=20.000
PolygonConnect PolygonRelief [IsPolygon and not (IsNamedPolygon('PolygonDirect'))] p1: thpad.connectstyle=Relief thpad.reliefconductorwidth=0.254 thpad.reliefentries=4 thpad.polygonreliefangle="90 Angle" thpad.airgapwidth=0.254 smdpad.connectstyle=Relief smdpad.reliefconductorwidth=0.254 smdpad.reliefentries=4 smdpad.polygonreliefangle="90 Angle" smdpad.airgapwidth=0.254 via.connectstyle=Direct via.reliefconductorwidth=0.254 via.reliefentries=4 via.polygonreliefangle="90 Angle" via.airgapwidth=0.254
PolygonConnect [All] p2: connectstyle=Direct reliefconductorwidth=0.254 reliefentries=4 polygonreliefangle="90 Angle" airgapwidth=0.254
RoutingVias [All] p1: holewidth=0.2 width=0.45 viastyle="Through Hole" minholewidth=0.2 minwidth=0.45 maxholewidth=0.7 maxwidth=1.27
SolderMaskExpansion [All] p1: expansion=0.102 istentingtop=FALSE
Width [All] p1: maxlimit=0.712 minlimit=0.127 preferedwidth=0.254
29 further rules are at their usual default settings.

## Classes and differential pairs
net class PWM_WL[1..4]: PWM_WL1 PWM_WL2 PWM_WL3 PWM_WL4
net class PWM_WH[1..4]: PWM_WH1 PWM_WH2 PWM_WH3 PWM_WH4
net class PWM_VL[1..4]: PWM_VL1 PWM_VL2 PWM_VL3 PWM_VL4
net class PWM_VH[1..4]: PWM_VH1 PWM_VH2 PWM_VH3 PWM_VH4
net class PWM_UL[1..4]: PWM_UL1 PWM_UL2 PWM_UL3 PWM_UL4
net class PWM_UH[1..4]: PWM_UH1 PWM_UH2 PWM_UH3 PWM_UH4
component class Top: C1 C2 C3 C4 C5 C11 C16 C17 C18 C19 C20 C21 C22 C23 C24 C25 C26 C27 C28 C29 C30 C31 C33 C34 C35 C36 C37 C41 C42 C43 C44 J1 J2 R2 R19
net class ISNS[1..4]: ISNS1 ISNS2 ISNS3 ISNS4
net class VSS_R[1..4]: VSS_R1 VSS_R2 VSS_R3 VSS_R4
channel class CurrentSenseAmp: U_CurrentSenseAmp1 U_CurrentSenseAmp2
component class U_CurrentSenseAmp2: C32_1 U4_1
component class U_CurrentSenseAmp1: C32_1 U4_1
channel class Half_Bridge_Driver: "U_Half Bridge Driver_1" "U_Half Bridge Driver_2" "U_Half Bridge Driver_3" "U_Half Bridge Driver_4"
component class "U_Half Bridge Driver_4": C1_4 C2_4 C3_4 D1_4 D2_4 D3_4 R3_4 R13_4 R14_4 R15_4 R16_4 R17_4 R20_4 R21_4 R22_4 U1_4
component class "U_Half Bridge Driver_3": C1_3 C2_3 C3_3 D1_3 D2_3 D3_3 R3_3 R13_3 R14_3 R15_3 R16_3 R17_3 R20_3 R21_3 R22_3 U1_3
component class "U_Half Bridge Driver_1": C1_1 C2_1 C3_1 D1_1 D2_1 D3_1 R3_1 R13_1 R14_1 R15_1 R16_1 R17_1 R20_1 R21_1 R22_1 U1_1
channel class MOSFETs: U_MOSFETs1 U_MOSFETs2 U_MOSFETs3 U_MOSFETs4
net class OUT_W[1..4]: OUT_W1 OUT_W2 OUT_W3 OUT_W4
net class OUT_V[1..4]: OUT_V1 OUT_V2 OUT_V3 OUT_V4
net class OUT_U[1..4]: OUT_U1 OUT_U2 OUT_U3 OUT_U4
net class GW_L[1..4]: GW_L1 GW_L2 GW_L3 GW_L4
net class GW_H[1..4]: GW_H1 GW_H2 GW_H3 GW_H4
net class GV_L[1..4]: GV_L1 GV_L2 GV_L3 GV_L4
net class GV_H[1..4]: GV_H1 GV_H2 GV_H3 GV_H4
net class GU_L[1..4]: GU_L1 GU_L2 GU_L3 GU_L4
net class GU_H[1..4]: GU_H1 GU_H2 GU_H3 GU_H4
component class "U_Half Bridge Driver_2": C1_2 C2_2 C3_2 D1_2 D2_2 D3_2 R3_2 R13_2 R14_2 R15_2 R16_2 R17_2 R20_2 R21_2 R22_2 U1_2 U_2
net class RPM[1..4]: RPM1 RPM2 RPM3 RPM4
net class ESC[1..4]: ESC1 ESC2 ESC3 ESC4
net class SNS_X[1..4]: SNS_X1 SNS_X2 SNS_X3 SNS_X4
net class SNS_W[1..4]: SNS_W1 SNS_W2 SNS_W3 SNS_W4
net class SNS_V[1..4]: SNS_V1 SNS_V2 SNS_V3 SNS_V4
net class SNS_U[1..4]: SNS_U1 SNS_U2 SNS_U3 SNS_U4
component class U_MCUs: C16_1 C16_2 C16_3 C16_4 C17_1 C17_2 C17_3 C17_4 TP1_1 TP1_2 TP1_3 TP1_4 TP2_1 TP2_2 TP2_3 TP2_4 U3_1 U3_2 U3_3 U3_4
component class U_5V_buck: C10 C12 C13 C14 C15 L1 U2
component class U_3V3_LDO: C6 C7 C8 C9 U1
component class U_MOSFETs4: C38_4 C39_4 C40_4 Q1_4 Q2_4 Q3_4 Q4_4 Q5_4 Q6_4 R1_4 R4_4 R5_4 R6_4 R7_4 R8_4 R9_4 R10_4 R11_4 R12_4 R18_4
component class U_MOSFETs3: C38_3 C39_3 C40_3 Q1_3 Q2_3 Q3_3 Q4_3 Q5_3 Q6_3 R1_3 R4_3 R5_3 R6_3 R7_3 R8_3 R9_3 R10_3 R11_3 R12_3 R18_3
component class U_MOSFETs2: C38_2 C39_2 C40_2 Q1_2 Q2_2 Q3_2 Q4_2 Q5_2 Q6_2 R1_2 R4_2 R5_2 R6_2 R7_2 R8_2 R9_2 R10_2 R11_2 R12_2 R18_2
component class U_MOSFETs1: C38_1 C39_1 C40_1 Q1_1 Q2_1 Q3_1 Q4_1 Q5_1 Q6_1 R1_1 R4_1 R5_1 R6_1 R7_1 R8_1 R9_1 R10_1 R11_1 R12_1 R18_1

## Components (designator, comment, footprint, x,y, rotation, side; value= is the part's Value field where it differs from the comment)
C1 "22 µF" "CAP 0805_2012" 0.6,1.85 r90 top
C1_1 "0.1 µF" "CAP 0402_1005" -7.15,11.75 r0 top (schematic designator C1)
C1_2 "0.1 µF" "CAP 0402_1005" 7.05,7.35 r180 top (schematic designator C1)
C1_3 "0.1 µF" "CAP 0402_1005" 6.9,-11.7 r180 top (schematic designator C1)
C1_4 "0.1 µF" "CAP 0402_1005" -6.9,-6.8 r0 top (schematic designator C1)
C2 "22 µF" "CAP 0805_2012" 10.2,-9.9 r0 bottom
C2_1 "0.1 µF" "CAP 0402_1005" -8.85,9 r90 top (schematic designator C2)
C2_2 "0.1 µF" "CAP 0402_1005" 7.95,10.8 r0 top (schematic designator C2)
C2_3 "0.1 µF" "CAP 0402_1005" 7.3,-8 r0 top (schematic designator C2)
C2_4 "0.1 µF" "CAP 0402_1005" -7.748,-10.391 r180 top (schematic designator C2)
C3 "22 µF" "CAP 0805_2012" -10.6,9.9 r180 bottom
C3_1 "0.1 µF" "CAP 0402_1005" -7.65,7 r90 top (schematic designator C3)
C3_2 "0.1 µF" "CAP 0402_1005" 6.85,12.3 r270 top (schematic designator C3)
C3_3 "0.1 µF" "CAP 0402_1005" 7.8,-6.5 r180 top (schematic designator C3)
C3_4 "0.1 µF" "CAP 0402_1005" -9.3,-12.3 r180 top (schematic designator C3)
C4 "22 µF" "CAP 0805_2012" -10.6,0.9 r180 bottom
C5 "22 µF" "CAP 0805_2012" -7.3,-14.4 r270 bottom
C6 "1µF" "CAP 0603_1608" 5.45,1.15 r90 top
C7 "0.1µF" "CAP 0603_1608" 6.85,1.15 r270 top
C8 "0.1µF" "CAP 0603_1608" 6.85,-1.45 r90 top
C9 "1µF" "CAP 0603_1608" 5.45,-1.45 r270 top
C10 "1 µF" "CAP 0402_1005" -3,-0.2 r90 top
C11 "22 µF" "CAP 0805_2012" -10.6,4.5 r180 bottom
C12 "1µF" "CAP 0603_1608" -2.8,2.1 r270 top
C13 "22µF" "CAP 0805_2012" -1.2,0.7 r270 top
C14 "22µF" "CAP 0805_2012" -6.9,-2 r180 top
C15 "0.1µF" "CAP 0603_1608" -7.2,0.6 r270 top
C16 "22 µF" "CAP 0805_2012" 0.45,1.85 r90 bottom
C16_1 "0.1 µF" "CAP 0402_1005" -8.35,11.7 r0 bottom
C16_2 "0.1 µF" "CAP 0402_1005" -5.2,3.25 r180 bottom
C16_3 "0.1 µF" "CAP 0402_1005" 5.1,-12.2 r180 bottom
C16_4 "0.1 µF" "CAP 0402_1005" -1.3,-11.6 r180 bottom
C17 "22 µF" "CAP 0805_2012" 0.45,-1.55 r270 bottom
C17_1 "0.1 µF" "CAP 0402_1005" -1.65,5.05 r90 bottom
C17_2 "0.1 µF" "CAP 0402_1005" 1.3,11.65 r0 bottom
C17_3 "0.1 µF" "CAP 0402_1005" 1.6,-5.1 r270 bottom
C17_4 "0.1 µF" "CAP 0402_1005" -4.7,-4.4 r0 bottom
C18 "22 µF" "CAP 0805_2012" -3.7,-14.4 r270 bottom
C19 "22 µF" "CAP 0805_2012" -10.6,-0.9 r180 bottom
C20 "22 µF" "CAP 0805_2012" 10.2,6.3 r0 bottom
C21 "22 µF" "CAP 0805_2012" -5.5,-14.4 r270 bottom
C22 "22 µF" "CAP 0805_2012" 0.6,-1.55 r270 top
C23 "22 µF" "CAP 0805_2012" 7.6,-14.4 r90 bottom
C24 "22 µF" "CAP 0805_2012" 10.2,-8.1 r0 bottom
C25 "22 µF" "CAP 0805_2012" 5.8,-14.4 r90 bottom
C26 "22 µF" "CAP 0805_2012" 4,-14.4 r90 bottom
C27 "22 µF" "CAP 0805_2012" 10.6,-0.9 r0 bottom
C28 "22 µF" "CAP 0805_2012" 10.2,-4.5 r0 bottom
C29 "22 µF" "CAP 0805_2012" -10.6,-4.5 r180 bottom
C30 "22 µF" "CAP 0805_2012" 10.6,0.9 r0 bottom
C31 "22 µF" "CAP 0805_2012" -10.6,-8.1 r180 bottom
C32_1 "0.1 µF" "CAP 0402_1005" 7.15,5.15 r270 bottom (schematic designator C32)
C32_2 "0.1 µF" "CAP 0402_1005" 5.25,3.3 r0 bottom (schematic designator C32)
C33 "22 µF" "CAP 0805_2012" 10.2,4.5 r0 bottom
C34 "22 µF" "CAP 0805_2012" 10.2,-6.3 r0 bottom
C35 "22 µF" "CAP 0805_2012" -10.6,-9.9 r180 bottom
C36 "22 µF" "CAP 0805_2012" -10.6,8.1 r180 bottom
C37 "0.1 µF" "CAP 0402_1005" -0.95,2.35 r90 bottom
C38_1 "10 pF" "CAP 0402_1005" -6.5,15 r90 top (schematic designator C38)
C38_2 "10 pF" "CAP 0402_1005" 6.5,15 r90 top (schematic designator C38)
C38_3 "10 pF" "CAP 0402_1005" 17.4,-12.59 r90 top (schematic designator C38)
C38_4 "10 pF" "CAP 0402_1005" -17.7,-13.45 r270 top (schematic designator C38)
C39_1 "10 pF" "CAP 0402_1005" -5.5,15 r90 top (schematic designator C39)
C39_2 "10 pF" "CAP 0402_1005" 5.5,15 r90 top (schematic designator C39)
C39_3 "10 pF" "CAP 0402_1005" 16.9,-15.89 r90 top (schematic designator C39)
C39_4 "10 pF" "CAP 0402_1005" -16.9,-15.85 r270 top (schematic designator C39)
C40_1 "10 pF" "CAP 0402_1005" -4.5,15 r90 top (schematic designator C40)
C40_2 "10 pF" "CAP 0402_1005" 4.5,15 r90 top (schematic designator C40)
C40_3 "10 pF" "CAP 0402_1005" 14.75,-18.11 r90 top (schematic designator C40)
C40_4 "10 pF" "CAP 0402_1005" -15.1,-17.51 r270 top (schematic designator C40)
C41 "22 µF" "CAP 0805_2012" 23.5,9.55 r90 bottom
C42 "22 µF" "CAP 0805_2012" 10.2,9.9 r0 bottom
C43 "22 µF" "CAP 0805_2012" 10.2,8.1 r0 bottom
C44 "22 µF" "CAP 0805_2012" 26.9,9.55 r90 bottom
D1_1 "Diode" "Diode DFN1608D-2 (SOD1608)" -8.05,5.2 r180 top (schematic designator D1)
D1_2 "Diode" "Diode DFN1608D-2 (SOD1608)" 4.25,12.65 r180 top (schematic designator D1)
D1_3 "Diode" "Diode DFN1608D-2 (SOD1608)" 5,-5.3 r90 top (schematic designator D1)
D1_4 "Diode" "Diode DFN1608D-2 (SOD1608)" -9.2,-13.4 r180 top (schematic designator D1)
D2_1 "Diode" "Diode DFN1608D-2 (SOD1608)" -8.75,6.9 r270 top (schematic designator D2)
D2_2 "Diode" "Diode DFN1608D-2 (SOD1608)" 8.6,11.9 r0 top (schematic designator D2)
D2_3 "Diode" "Diode DFN1608D-2 (SOD1608)" 8.3,-4.2 r180 top (schematic designator D2)
D2_4 "Diode" "Diode DFN1608D-2 (SOD1608)" -10.8,-12.8 r270 top (schematic designator D2)
D3_1 "Diode" "Diode DFN1608D-2 (SOD1608)" -8.8,11.2 r90 top (schematic designator D3)
D3_2 "Diode" "Diode DFN1608D-2 (SOD1608)" 8.65,6.75 r270 top (schematic designator D3)
D3_3 "Diode" "Diode DFN1608D-2 (SOD1608)" 10.2,-11.8 r180 bottom (schematic designator D3)
D3_4 "Diode" "Diode DFN1608D-2 (SOD1608)" -8.45,-5.25 r90 top (schematic designator D3)
J1 "62200821121" 62200821121 0,14.6 r0 top locked
J2 "62200821121" 62200821121 0,-14.6 r180 top locked
L1 "4.7µH" "IND 1008_2520" -2.85,-2.25 r0 top
Q1_1 "NVTFS5C680NL" NVTFS015N04CTAG -11.3,2.2 r0 top locked (schematic designator Q1)
Q1_2 "NVTFS5C680NL" NVTFS015N04CTAG 11.3,2.2 r180 top locked (schematic designator Q1)
Q1_3 "NVTFS5C680NL" NVTFS015N04CTAG 11.3,-2.2 r180 top locked (schematic designator Q1)
Q1_4 "NVTFS5C680NL" NVTFS015N04CTAG -11.3,-2.2 r0 top locked (schematic designator Q1)
Q2_1 "NVTFS5C680NL" NVTFS015N04CTAG -11.3,5.9 r0 top locked (schematic designator Q2)
Q2_2 "NVTFS5C680NL" NVTFS015N04CTAG 11.3,5.9 r180 top locked (schematic designator Q2)
Q2_3 "NVTFS5C680NL" NVTFS015N04CTAG 11.3,-5.9 r180 top locked (schematic designator Q2)
Q2_4 "NVTFS5C680NL" NVTFS015N04CTAG -11.3,-5.9 r0 top locked (schematic designator Q2)
Q3_1 "NVTFS5C680NL" NVTFS015N04CTAG -11.3,9.6 r0 top locked (schematic designator Q3)
Q3_2 "NVTFS5C680NL" NVTFS015N04CTAG 11.3,9.6 r180 top locked (schematic designator Q3)
Q3_3 "NVTFS5C680NL" NVTFS015N04CTAG 11.3,-9.6 r180 top locked (schematic designator Q3)
Q3_4 "NVTFS5C680NL" NVTFS015N04CTAG -11.3,-9.6 r0 top locked (schematic designator Q3)
Q4_1 "NVTFS5C680NL" NVTFS015N04CTAG -14.3,2.2 r180 bottom (schematic designator Q4)
Q4_2 "NVTFS5C680NL" NVTFS015N04CTAG 14.3,2.2 r0 bottom (schematic designator Q4)
Q4_3 "NVTFS5C680NL" NVTFS015N04CTAG 14.3,-2.2 r0 bottom (schematic designator Q4)
Q4_4 "NVTFS5C680NL" NVTFS015N04CTAG -14.3,-2.2 r180 bottom (schematic designator Q4)
Q5_1 "NVTFS5C680NL" NVTFS015N04CTAG -14.3,5.9 r180 bottom (schematic designator Q5)
Q5_2 "NVTFS5C680NL" NVTFS015N04CTAG 14.3,5.9 r0 bottom (schematic designator Q5)
Q5_3 "NVTFS5C680NL" NVTFS015N04CTAG 14.3,-5.9 r0 bottom (schematic designator Q5)
Q5_4 "NVTFS5C680NL" NVTFS015N04CTAG -14.3,-5.9 r180 bottom (schematic designator Q5)
Q6_1 "NVTFS5C680NL" NVTFS015N04CTAG -14.3,9.6 r180 bottom (schematic designator Q6)
Q6_2 "NVTFS5C680NL" NVTFS015N04CTAG 14.3,9.6 r0 bottom (schematic designator Q6)
Q6_3 "NVTFS5C680NL" NVTFS015N04CTAG 14.3,-9.6 r0 bottom (schematic designator Q6)
Q6_4 "NVTFS5C680NL" NVTFS015N04CTAG -14.3,-9.6 r180 bottom (schematic designator Q6)
R1_1 "15 mOhms" "RES 0805_2012" -10.6,2.7 r180 bottom (schematic designator R1)
R1_2 "15 mOhms" "RES 0805_2012" 10.6,2.7 r0 bottom (schematic designator R1)
R1_3 "15 mOhms" "RES 0805_2012" 10.6,-2.7 r0 bottom (schematic designator R1)
R1_4 "15 mOhms" "RES 0805_2012" -10.6,-2.7 r180 bottom (schematic designator R1)
R2 "1 Ohm" "RES 0402_1005" 1.85,2.4 r270 bottom
R3_1 "22 Ohm" "RES 0402_1005" -6.65,6.95 r270 top (schematic designator R3)
R3_2 "22 Ohm" "RES 0402_1005" 5.85,12.25 r90 top (schematic designator R3)
R3_3 "22 Ohm" "RES 0402_1005" 7.4,-5.6 r0 top (schematic designator R3)
R3_4 "22 Ohm" "RES 0402_1005" -6.8,-12.2 r180 top (schematic designator R3)
R4_1 "33 kOhms" "RES 0402_1005" -8.15,14.45 r90 bottom (schematic designator R4)
R4_2 "33 kOhms" "RES 0402_1005" 7.15,14.45 r90 bottom (schematic designator R4)
R4_3 "33 kOhms" "RES 0402_1005" 0.7,-12.5 r0 bottom (schematic designator R4)
R4_4 "33 kOhms" "RES 0402_1005" -0.4,-4 r180 bottom (schematic designator R4)
R5_1 "33 kOhms" "RES 0402_1005" -9.15,14.45 r270 bottom (schematic designator R5)
R5_2 "33 kOhms" "RES 0402_1005" 9.15,14.45 r270 bottom (schematic designator R5)
R5_3 "33 kOhms" "RES 0402_1005" 12.4,-15.4 r0 top (schematic designator R5)
R5_4 "33 kOhms" "RES 0402_1005" -12.4,-15.4 r180 top (schematic designator R5)
R6_1 "33 kOhms" "RES 0402_1005" -5.15,14.45 r270 bottom (schematic designator R6)
R6_2 "33 kOhms" "RES 0402_1005" 5.15,14.45 r90 bottom (schematic designator R6)
R6_3 "33 kOhms" "RES 0402_1005" 0.6,-11.5 r0 bottom (schematic designator R6)
R6_4 "33 kOhms" "RES 0402_1005" -0.4,-5 r180 bottom (schematic designator R6)
R7_1 "33 kOhms" "RES 0402_1005" -10.15,14.45 r270 bottom (schematic designator R7)
R7_2 "33 kOhms" "RES 0402_1005" 10.15,14.45 r270 bottom (schematic designator R7)
R7_3 "33 kOhms" "RES 0402_1005" 14.8,-14.8 r45 top (schematic designator R7)
R7_4 "33 kOhms" "RES 0402_1005" -14.8,-14.8 r135 top (schematic designator R7)
R8_1 "33 kOhms" "RES 0402_1005" -4.15,14.45 r270 bottom (schematic designator R8)
R8_2 "33 kOhms" "RES 0402_1005" 3.15,14.45 r90 bottom (schematic designator R8)
R8_3 "33 kOhms" "RES 0402_1005" 0.7,-10.5 r0 bottom (schematic designator R8)
R8_4 "33 kOhms" "RES 0402_1005" -0.4,-6 r180 bottom (schematic designator R8)
R9_1 "33 kOhms" "RES 0402_1005" -11.15,14.45 r270 bottom (schematic designator R9)
R9_2 "33 kOhms" "RES 0402_1005" 11.15,14.45 r270 bottom (schematic designator R9)
R9_3 "33 kOhms" "RES 0402_1005" 15.1,-12.6 r90 top (schematic designator R9)
R9_4 "33 kOhms" "RES 0402_1005" -15.1,-12.6 r90 top (schematic designator R9)
R10_1 "10 kOhms" "RES 0402_1005" -7.15,14.45 r270 bottom (schematic designator R10)
R10_2 "10 kOhms" "RES 0402_1005" 8.15,14.45 r90 bottom (schematic designator R10)
R10_3 "10 kOhms" "RES 0402_1005" 9.7,-14.7 r0 bottom (schematic designator R10)
R10_4 "10 kOhms" "RES 0402_1005" -9.6,-14.7 r180 bottom (schematic designator R10)
R11_1 "10 kOhms" "RES 0402_1005" -6.15,14.45 r90 bottom (schematic designator R11)
R11_2 "10 kOhms" "RES 0402_1005" 6.15,14.45 r90 bottom (schematic designator R11)
R11_3 "10 kOhms" "RES 0402_1005" 9.7,-15.7 r0 bottom (schematic designator R11)
R11_4 "10 kOhms" "RES 0402_1005" -9.6,-15.7 r180 bottom (schematic designator R11)
R12_1 "10 kOhms" "RES 0402_1005" -3.15,14.45 r90 bottom (schematic designator R12)
R12_2 "10 kOhms" "RES 0402_1005" 4.15,14.45 r90 bottom (schematic designator R12)
R12_3 "10 kOhms" "RES 0402_1005" 9.7,-13.3 r0 bottom (schematic designator R12)
R12_4 "10 kOhms" "RES 0402_1005" -9.6,-13.7 r180 bottom (schematic designator R12)
R13_1 "22 Ohm" "RES 0402_1005" -5.95,12.75 r180 top (schematic designator R13)
R13_2 "22 Ohm" "RES 0402_1005" 5.7,6.5 r0 top (schematic designator R13)
R13_3 "22 Ohm" "RES 0402_1005" 9.4,-12.4 r0 top (schematic designator R13)
R13_4 "22 Ohm" "RES 0402_1005" -5.2,-5.6 r90 top (schematic designator R13)
R14_1 "22 Ohm" "RES 0402_1005" -7.3,9.15 r180 top (schematic designator R14)
R14_2 "22 Ohm" "RES 0402_1005" 7.95,9.8 r0 top (schematic designator R14)
R14_3 "22 Ohm" "RES 0402_1005" 7.8,-9 r0 top (schematic designator R14)
R14_4 "22 Ohm" "RES 0402_1005" -7.48,-9.57 r180 top (schematic designator R14)
R15_1 "22 Ohm" "RES 0402_1005" -4.25,12.85 r90 top (schematic designator R15)
R15_2 "22 Ohm" "RES 0402_1005" 6.4,5.5 r0 top (schematic designator R15)
R15_3 "22 Ohm" "RES 0402_1005" 10.1,-13.3 r0 top (schematic designator R15)
R15_4 "22 Ohm" "RES 0402_1005" -4.2,-5.6 r90 top (schematic designator R15)
R16_1 "22 Ohm" "RES 0402_1005" -7.3,10.75 r180 top (schematic designator R16)
R16_2 "22 Ohm" "RES 0402_1005" 7.95,8.35 r0 top (schematic designator R16)
R16_3 "22 Ohm" "RES 0402_1005" 7.7,-10.8 r0 top (schematic designator R16)
R16_4 "22 Ohm" "RES 0402_1005" -7.7,-7.9 r180 top (schematic designator R16)
R17_1 "22 Ohm" "RES 0402_1005" -3.25,12.85 r90 top (schematic designator R17)
R17_2 "22 Ohm" "RES 0402_1005" 3.05,6.4 r180 top (schematic designator R17)
R17_3 "22 Ohm" "RES 0402_1005" 10.1,-14.4 r0 top (schematic designator R17)
R17_4 "22 Ohm" "RES 0402_1005" -3.2,-5.6 r90 top (schematic designator R17)
R18_1 "15 mOhms" "RES 0805_2012" 18.75,-13.1 r90 top (schematic designator R18)
R18_2 "15 mOhms" "RES 0805_2012" 18.75,-6.4 r90 top (schematic designator R18)
R18_3 "15 mOhms" "RES 0805_2012" 18.75,0.35 r90 top (schematic designator R18)
R18_4 "15 mOhms" "RES 0805_2012" 18.75,7.05 r90 top (schematic designator R18)
R19 "1 Ohm" "RES 0402_1005" 1.2,4.05 r180 bottom
R20_1 "10k" "RES 0402_1005" -5.05,18.825 r90 top (schematic designator R20)
R20_2 "10k" "RES 0402_1005" 27.85,-7.9 r90 top (schematic designator R20)
R20_3 "10k" "RES 0402_1005" 27.85,-2.15 r90 top (schematic designator R20)
R20_4 "10k" "RES 0402_1005" 27.85,3.55 r90 top (schematic designator R20)
R21_1 "10k" "RES 0402_1005" -9.5,18.825 r90 top (schematic designator R21)
R21_2 "10k" "RES 0402_1005" 23.2,-7.9 r90 top (schematic designator R21)
R21_3 "10k" "RES 0402_1005" 23.2,-2.15 r90 top (schematic designator R21)
R21_4 "10k" "RES 0402_1005" 23.2,3.55 r90 top (schematic designator R21)
R22_1 "10k" "RES 0402_1005" -7.65,18.875 r90 top (schematic designator R22)
R22_2 "10k" "RES 0402_1005" 18.4,-7.9 r90 top (schematic designator R22)
R22_3 "10k" "RES 0402_1005" 18.4,-2.15 r90 top (schematic designator R22)
R22_4 "10k" "RES 0402_1005" 18.4,3.55 r90 top (schematic designator R22)
TP1_1 "0.8mm" "TP  0.8mm" -5.35,4.8 r90 bottom
TP1_2 "0.8mm" "TP  0.8mm" 5.3,11.4 r270 bottom
TP1_3 "0.8mm" "TP  0.8mm" 5.5,-4.8 r90 bottom
TP1_4 "0.8mm" "TP  0.8mm" -5.3,-11.4 r0 bottom
TP2_1 "0.8mm" "TP  0.8mm" -6.4,4.8 r90 bottom
TP2_2 "0.8mm" "TP  0.8mm" 6.4,11.4 r270 bottom
TP2_3 "0.8mm" "TP  0.8mm" 6.6,-4.8 r90 bottom
TP2_4 "0.8mm" "TP  0.8mm" -6.4,-11.4 r0 bottom
U1 "MIC5504" "TI SOT-23-5 DBV" 3.05,-0.85 r270 top
U1_1 "FD6288Q" QFN50P400X400X100-25N -3.9,9.4 r180 top locked (schematic designator U1)
U1_2 "FD6288Q" QFN50P400X400X100-25N 3.9,9.4 r0 top locked (schematic designator U1)
U1_3 "FD6288Q" QFN50P400X400X100-25N 3.9,-9.4 r0 top locked (schematic designator U1)
U1_4 "FD6288Q" QFN50P400X400X100-25N -3.9,-9.4 r180 top locked (schematic designator U1)
U2 "5V Buck" "TSOT-26-6 - 3.2mm" -5,0.6 r0 top
U3_1 "STM32G431KBU3" QFN50P400X400X60-32N -4.4,8.1 r270 bottom
U3_2 "STM32G431KBU3" QFN50P400X400X60-32N 4.4,8.1 r90 bottom
U3_3 "STM32G431KBU3" QFN50P400X400X60-32N 4.4,-8.1 r90 bottom
U3_4 "STM32G431KBU3" QFN50P400X400X60-32N -4.4,-8.1 r270 bottom
U4_1 "INA2180" WSON-8_2x2 -5.15,1.65 r180 bottom (schematic designator U4)
U4_2 "INA2180" WSON-8_2x2 5.2,1.75 r180 bottom (schematic designator U4)

## Footprints (in the part's own frame and the unit in brackets; to place one, negate y for a bottom-side part, rotate by r counter-clockwise, add the part's x,y. Pads: shape width x height; smd on the part's side, far side on the other; paste and mask are expansions set on the pad)
62200821121 [mm] "Pin Header, pitch 1.27 mm, THT, Vertical, dual row, 8p"
  round 1.05 hole 0.7: 1(-1.905,-0.635) 2(-1.905,0.635) 3(-0.635,-0.635) 4(-0.635,0.635) 5(0.635,-0.635) 6(0.635,0.635) 7(1.905,-0.635) 8(1.905,0.635)
  silkscreen extent -2.69,-1.78 2.69,1.78, body extent -2.54,-1.7 2.54,1.7, height 5.33
"CAP 0402_1005" [mm] "Chip Capacitor, 2-Leads, Body 1.02x0.51mm, IPC Medium Density"
  rect 0.6x0.64 smd: 1(-0.44,0) 2(0.44,0)
  silkscreen extent -1,-0.5 1,0.5, body extent -0.5,-0.26 0.5,0.26, height 0.52
"CAP 0603_1608" [mm] "Chip Capacitor, 2-Leads, Body 1.60x0.80mm, IPC Medium Density"
  rect 0.9x1 smd: 1(-0.675,0) 2(0.675,0)
  silkscreen extent -1.4,-0.7 1.4,0.7, body extent -0.8,-0.41 0.8,0.41, height 0.82
"CAP 0805_2012" [mm] "Chip Capacitor, 2-Leads, Body 2.00x1.20mm, IPC Medium Density"
  rect 1.3x1.4 smd: 1(-0.8,0) 2(0.8,0)
  silkscreen extent -1.7,-0.9 1.7,0.9, body extent -1,-0.64 1,0.64, height 1.26
"Diode DFN1608D-2 (SOD1608)" [mm]
  rect 1.05x0.8 smd: 1(-0.425,0)
  rect 0.65x0.8 smd: 2(0.625,0)
  silkscreen extent -1.1,-0.6 1.1,0.6, body extent -0.8,-0.4 0.8,0.4, height 0.4
"IND 1008_2520" [mm] "Chip Inductance, 2-leads, Body 2.5x2.1mm, IPC Medium Density"
  rect 1.2x1.75 smd: 1(-1.275,0) 2(1.275,0)
  silkscreen extent -2.18,-1.22 2.2,1.22, body extent -1.3,-1.05 1.3,1.05, height 1
NVTFS015N04CTAG [mm]
  rect 0.66x0.42 smd: 1(-1.47,0.975) 2(-1.47,0.325) 3(-1.47,-0.325) 4(-1.47,-0.975)
  rect 0.8x0.34 smd: 5(1.3,-0.975) 6(1.3,-0.325) 7(1.3,0.325) 8(1.3,0.975)
  Top Layer region: -0.5,-1.185 -0.5,1.185 -0.32,1.185 -0.32,1.73 0.25,1.73 0.25,1.185 1.8,1.185 1.8,0.765 1.33,0.765 1.33,0.535 1.8,0.535 1.8,0.115 1.33,0.115 1.33,-0.115 1.8,-0.115 1.8,-0.535 1.33,-0.535 1.33,-0.765 1.8,-0.765 1.8,-1.185 0.25,-1.185 0.25,-1.73 -0.32,-1.73 -0.32,-1.185
  silkscreen extent -1.58,-1.58 1.58,1.58, body extent -1.7,-1.7 1.7,1.7, height 1.1
QFN50P400X400X60-32N [mm]
  rect 3.45x3.45 smd mask+0.051: 0(0,0)
  rect 0.6x0.3 smd mask+0.051: 1(-2.35,1.75) 2(-2.35,1.25) 3(-2.35,0.75) 4(-2.35,0.25) 5(-2.35,-0.25) 6(-2.35,-0.75) 7(-2.35,-1.25) 8(-2.35,-1.75) 17(2.35,-1.75) 18(2.35,-1.25) 19(2.35,-0.75) 20(2.35,-0.25) 21(2.35,0.25) 22(2.35,0.75) 23(2.35,1.25) 24(2.35,1.75)
  rect 0.3x0.6 smd mask+0.051: 9(-1.75,-2.35) 10(-1.25,-2.35) 11(-0.75,-2.35) 12(-0.25,-2.35) 13(0.25,-2.35) 14(0.75,-2.35) 15(1.25,-2.35) 16(1.75,-2.35) 25(1.75,2.35) 26(1.25,2.35) 27(0.75,2.35) 28(0.25,2.35) 29(-0.25,2.35) 30(-0.75,2.35) 31(-1.25,2.35) 32(-1.75,2.35)
  silkscreen extent -2.6,-2.25 2.25,2.25, body extent -2.25,-2.25 2.25,2.25, height 0.68
QFN50P400X400X100-25N [mm]
  rrect25% 0.86x0.27 smd: 1(-1.935,1.25) 2(-1.935,0.75) 3(-1.935,0.25) 4(-1.935,-0.25) 5(-1.935,-0.75) 6(-1.935,-1.25) 13(1.935,-1.25) 14(1.935,-0.75) 15(1.935,-0.25) 16(1.935,0.25) 17(1.935,0.75) 18(1.935,1.25)
  rrect25% 0.27x0.86 smd: 7(-1.25,-1.935) 8(-0.75,-1.935) 9(-0.25,-1.935) 10(0.25,-1.935) 11(0.75,-1.935) 12(1.25,-1.935) 19(1.25,1.935) 20(0.75,1.935) 21(0.25,1.935) 22(-0.25,1.935) 23(-0.75,1.935) 24(-1.25,1.935)
  rect 2.45x2.45 smd paste-0.45: 25(0,0)
  silkscreen extent -3.08,-2 2,2, body extent -2,-2 2,2, height 1
"RES 0402_1005" [mm] "Chip Resistor, 2-Leads, Body 1.0x0.5mm, IPC Medium Density"
  rect 0.75x0.6 smd: 1(-0.575,0) 2(0.575,0)
  silkscreen extent -1.14,-0.51 1.14,0.51, body extent -0.5,-0.25 0.5,0.25, height 0.35
"RES 0805_2012" [mm] "Chip Resistor, 2-Leads, Body 2.00x1.25mm, IPC Medium Density"
  rect 1.15x1.35 smd: 1(-0.875,0) 2(0.875,0)
  silkscreen extent -1.7,-0.9 1.7,0.9, body extent -1,-0.62 1,0.63, height 0.6
"TI SOT-23-5 DBV" [mm] "SOT23, 5-Leads, Body 2.90x2.80mm, Pitch 0.95mm, IPC Medium Density"
  rect 1x0.55 smd: 1(-1.35,0.95) 2(-1.35,0) 3(-1.35,-0.95) 4(1.35,-0.95) 5(1.35,0.95)
  silkscreen extent -1.47,-1.55 0.5,1.9, body extent -1.44,-1.43 1.39,1.48, height 1.5
"TP  0.8mm" [mm]
  round 0.8 smd: 1(0,0)
"TSOT-26-6 - 3.2mm" [mm]
  rect 0.7x1 smd: 1(0.95,1.1) 2(0,1.1) 3(-0.95,1.1) 4(-0.95,-1.1) 5(0,-1.1) 6(0.95,-1.1)
  silkscreen extent 1.55,1.25 1.66,1.35, body extent -1.45,-1.2 1.45,1.2, height 1
WSON-8_2x2 [mm]
  rrect25% 0.5x0.25 smd: 1(-0.95,0.75) 2(-0.95,0.25) 3(-0.95,-0.25) 4(-0.95,-0.75) 5(0.95,-0.75) 6(0.95,-0.25) 7(0.95,0.25) 8(0.95,0.75)
  rrect5% 0.9x1.6 smd paste-2: 9(0,0)
  silkscreen extent -1.01,1.14 -0.89,1.26, body extent -1,-1 1,1, height 0.8

## Part data
C1 C2 C3 C4 C5 C11 C16 C17 C18 C19 C20 C21 C22 C23 C24 C25 C26 C27 C28 C29 C30 C31 C33 C34 C35 C36 C41 C42 C43 C44: library part CC0805MKX5R8BB226, "CAP CER 22UF 25V X5R 0805", Device Package="0805 (2012 Metric)", Manufacturer=Yageo, Operating Temperature="-55°C ~ 85°C", Supplier Part Number 1=311-1903-1-ND, Temperature Coefficient=X5R, Tolerance=±20%, Voltage - Rated=25V, Applications="General Purpose", Capacitance="22 µF", ComponentLink1Description=Datasheet, ComponentLink1URL=https://www.yageo.com/upload/media/product/productsearch/datasheet/mlcc/UPY-GPHC_X5R_4V-to-50V_25.pdf, ComponentLink2Description="DigiKey Link", ComponentLink2URL=https://www.digikey.com/en/products/detail/yageo/CC0805MKX5R8BB226/5195309, Lifecycle Status=Active, Minimum Order=1, Mounting Type="Surface Mount, MLCC", Package / Case="0805 (2012 Metric)", Packaging=TapeAndReel, Part Number=CC0805MKX5R8BB226, Part Status=Active, PartId=39226, Price=0.10, Series=CC, Size / Dimension="0.079\" L x 0.049\" W (2.00mm x 1.25mm)", Supplier 1=DigiKey, Thickness (Max)="0.057\" (1.45mm)"
  C1 C2 C3 C4 C5 C11 C16 C17 C18 C19 C21 C22 C23 C24 C25 C26 C27 C28 C29 C30 C31 C33 C34 C35 C36 C41 C42 C43 C44: LastUpdated="8/21/2022 8:03:23 PM"
  C20: LastUpdated="8/25/2022 6:52:09 AM"
C1_1 C1_2 C1_3 C1_4 C2_1 C2_2 C2_3 C2_4 C3_1 C3_2 C3_3 C3_4 C16_1 C16_2 C16_3 C16_4 C17_1 C17_2 C17_3 C17_4 C32_1 C32_2 C37: library part C0402C104K4RACAUTO, "CAP CER 0.1UF 16V X7R 0402", Device Package="0402 (1005 Metric)", Manufacturer=KEMET, Operating Temperature="-55°C ~ 125°C", Ratings=AEC-Q200, Supplier Part Number 1=399-6828-1-ND, Temperature Coefficient=X7R, Tolerance=±10%, Voltage - Rated=16V, Applications="Automotive, Bypass, Decoupling", Capacitance="0.1 µF", ComponentLink1Description=Datasheet, ComponentLink1URL=https://api.kemet.com/component-edge/download/specsheet/C0402C104K4RACAUTO.pdf, ComponentLink2Description="DigiKey Link", ComponentLink2URL=https://www.digikey.com/en/products/detail/kemet/C0402C104K4RACAUTO/3314827, LastUpdated="8/14/2022 9:05:51 PM", Lifecycle Status=Active, Minimum Order=1, Mounting Type="Surface Mount, MLCC", Package / Case="0402 (1005 Metric)", Packaging=TapeAndReel, Part Number=C0402C104K4RACAUTO, Part Status=Active, PartId=3024, Price=0.01, Series="SMD Auto X7R", Size / Dimension="0.039\" L x 0.020\" W (1.00mm x 0.50mm)", Supplier 1=DigiKey, Thickness (Max)="0.022\" (0.55mm)"
C6 C9 C12: library part GCJ188R71E105KA01D, "CAP CER 1UF 25V X7R 0603", Device Package="0603 (1608 Metric)", Manufacturer="Murata Electronics", Operating Temperature="-55°C ~ 125°C", Ratings=AEC-Q200, Supplier Part Number 1=490-14409-1-ND, Temperature Coefficient=X7R, Tolerance=±10%, Applications="Automotive, Boardflex Sensitive", Capacitance=1µF, ComponentLink1Description=Datasheet, ComponentLink1URL=https://search.murata.co.jp/Ceramy/image/img/A01X/G101/ENG/GCJ188R71E105KA01-01.pdf, ComponentLink2Description="DigiKey Link", ComponentLink2URL=http://digikey.com/product-detail/en/murata-electronics/GCJ188R71E105KA01D/490-14409-1-ND/6606870, Features="Soft Termination", LastUpdated="13-Aug-20 10:24:06 AM", Lifecycle Status=Active, Minimum Order=1, Mounting Type="Surface Mount, MLCC", Package / Case="0603 (1608 Metric)", Packaging=TapeAndReel, Part Number=GCJ188R71E105KA01D, Part Status=Active, PartId=9566, Price=0.05, Series=GCJ, Size / Dimension="0.063\" L x 0.031\" W (1.60mm x 0.80mm)", Supplier 1=DigiKey, Thickness (Max)="0.035\" (0.90mm)"
C7 C8 C15: library part GCG188R92A104KA03D, "CAP CER 0.1UF 100V 0603 EPOXY", Device Package="0603 (1608 Metric)", Manufacturer="Murata Electronics", Operating Temperature="-55°C ~ 150°C", Ratings=AEC-Q200, Supplier Part Number 1=490-18197-1-ND, Temperature Coefficient=X8R, Tolerance=±10%, Voltage - Rated=100V, Applications=Automotive, Capacitance=0.1µF, ComponentLink1Description=Datasheet, ComponentLink1URL=https://search.murata.co.jp/Ceramy/image/img/A01X/G101/ENG/GCG188R92A104KA03-01.pdf, ComponentLink2Description="DigiKey Link", ComponentLink2URL=http://digikey.com/product-detail/en/murata-electronics/GCG188R92A104KA03D/490-18197-1-ND/9867926, Features="Epoxy Mountable", LastUpdated="21-Jan-20 12:01:59 AM", Lifecycle Status=Active, Minimum Order=1, Mounting Type="Surface Mount, MLCC, Epoxy", Package / Case="0603 (1608 Metric)", Packaging=TapeAndReel, Part Number=GCG188R92A104KA03D, Part Status=Active, PartId=9025, Price=0.07, Series=GCG, Size / Dimension="0.063\" L x 0.031\" W (1.60mm x 0.80mm)", Supplier 1=DigiKey, Thickness (Max)="0.035\" (0.90mm)"
C10 C38_1 C38_2 C38_3 C38_4 C39_1 C39_2 C39_3 C39_4 C40_1 C40_2 C40_3 C40_4: library part C0402C104K4RACAUTO, "CAP CER 0.1UF 16V X7R 0402", Capacitance="0.1 µF", Device Package="0402 (1005 Metric)", Manufacturer=KEMET, Operating Temperature="-55°C ~ 125°C", Ratings=AEC-Q200, Supplier Part Number 1=399-6828-1-ND, Temperature Coefficient=X7R, Tolerance=±10%, Voltage - Rated=16V, Applications="Automotive, Bypass, Decoupling", ComponentLink1Description=Datasheet, ComponentLink1URL=https://api.kemet.com/component-edge/download/specsheet/C0402C104K4RACAUTO.pdf, ComponentLink2Description="DigiKey Link", ComponentLink2URL=https://www.digikey.com/en/products/detail/kemet/C0402C104K4RACAUTO/3314827, LastUpdated="8/14/2022 9:05:51 PM", Lifecycle Status=Active, Minimum Order=1, Mounting Type="Surface Mount, MLCC", Package / Case="0402 (1005 Metric)", Packaging=TapeAndReel, Part Number=C0402C104K4RACAUTO, Part Status=Active, PartId=3024, Price=0.01, Series="SMD Auto X7R", Size / Dimension="0.039\" L x 0.020\" W (1.00mm x 0.50mm)", Supplier 1=DigiKey, Thickness (Max)="0.022\" (0.55mm)"
C13: library part CL21A226MOQNNNE, "CAP CER 22UF 16V X5R 0805", Device Package="0805 (2012 Metric)", Manufacturer="Samsung Electro-Mechanics", Operating Temperature="-55°C ~ 85°C", Supplier Part Number 1=1276-2909-1-ND, Temperature Coefficient=X5R, Tolerance=±20%, Voltage - Rated=16V, Applications="General Purpose", Capacitance=22µF, ComponentLink1Description=Datasheet, ComponentLink1URL=http://www.samsungsem.com/kr/support/product-search/mlcc/CL21A226MOQNNNE.jsp, ComponentLink2Description="DigiKey Link", ComponentLink2URL=http://digikey.com/product-detail/en/samsung-electro-mechanics/CL21A226MOQNNNE/1276-2909-1-ND/3890995, LastUpdated="21-Jan-20 12:03:05 AM", Lifecycle Status=Active, Minimum Order=1, Mounting Type="Surface Mount, MLCC", Package / Case="0805 (2012 Metric)", Packaging=TapeAndReel, Part Number=CL21A226MOQNNNE, Part Status=Active, PartId=3052, Price=0.11, Series=CL, Size / Dimension="0.079\" L x 0.049\" W (2.00mm x 1.25mm)", Supplier 1=DigiKey, Thickness (Max)="0.055\" (1.40mm)"
C14: library part C2012X7S1E106K125AC, "CAP CER 10UF 25V X7S 0805", Capacitance=10µF, Device Package="0805 (2012 Metric)", Manufacturer="TDK Corporation", Operating Temperature="-55°C ~ 125°C", Supplier Part Number 1=445-181600-1-ND, Temperature Coefficient=X7S, Tolerance=±10%, Voltage - Rated=25V, Applications="General Purpose", ComponentLink1Description=Datasheet, ComponentLink1URL=https://product.tdk.com/en/search/capacitor/ceramic/mlcc/info?part_no=C2012X7S1E106K125AC?ref_disty=digikey, ComponentLink2Description="DigiKey Link", ComponentLink2URL=http://digikey.com/product-detail/en/tdk-corporation/C2012X7S1E106K125AC/445-181600-1-ND/9991478, Features="Low ESL", LastUpdated="21-Jan-20 12:03:04 AM", Lifecycle Status=Active, Minimum Order=1, Mounting Type="Surface Mount, MLCC", Package / Case="0805 (2012 Metric)", Packaging=TapeAndReel, Part Number=C2012X7S1E106K125AC, Part Status=Active, PartId=3339, Price=0.15, Series=C, Size / Dimension="0.079\" L x 0.049\" W (2.00mm x 1.25mm)", Supplier 1=DigiKey, Thickness (Max)="0.057\" (1.45mm)"
D1_1 D1_2 D1_3 D1_4 D2_1 D2_2 D2_3 D2_4 D3_1 D3_2 D3_3 D3_4: "DFN1608D-2 (SOD1608)", Digikey Part Number=CLV1L-FKB-CHMMQEHBB7673673-ND, Manufacturer=Cree, Mouser Part Number=941-CLV1LFKBC7673673, Package=LED_3MM2X2MM8, Temperature="-40°C to +100°C", Temperature Range High=+100°C, Temperature Range Low=-40°C, ComponentLink1Description=Upverter, ComponentLink1URL=https://upverter.com/upn/revision/9d0b31f7b1982705/, ComponentLink2Description=Datasheet, ComponentLink2URL=http://www.cree.com/~/media/Files/Cree/LED-Components-and-Modules/HB/Data-Sheets/CLV1L-FKB-1238.pdf, Digikey Description="DIODE LED RGB DIFFUSED 4LCC SMD", Lead Free=yes, Price=0.203999996142, RoHS=TRUE, Supplier 1=Digi-Key, Supplier 2=Mouser, Supplier Part Number 1=CLV1L-FKB-CHMMQEHBB7673673-ND, Supplier Part Number 2=941-CLV1LFKBC7673673
J1 J2: "WR-PHD Pin Header, THT, pitch 1.27mm, Dual Row, Vertical, 8p", Contact Resistance=20mOhm, Manufacturer="Wurth Elektronik", Operating Temperature="-40 to +105degC", Rated Current=1A, Withstanding Voltage=500VAC, Working Voltage=100VAC, ComponentLink1Description=Manufacturer, ComponentLink1URL=http://www.we-online.de, ComponentLink2Description=Datasheet, ComponentLink2URL=https://www.we-online.com/catalog/datasheet/62200821121.pdf, Gender="Pin Header", Manufacturer Part Number=62200821121, Mounting Technology=THT, Orientation=Vertical, Packaging=Box, Pin Number=8, Pitch=1.27mm, Published Date="May 2020", Row Number=Dual, System=Connector
L1: library part MLP2520S4R7ST0S1, "FIXED IND 4.7UH 1A 110 MOHM SMD", Current Rating (Amps)=1A, DC Resistance (DCR)="143mOhm Max", Device Package="1008 (2520 Metric)", Inductance Frequency - Test=2MHz, Manufacturer="TDK Corporation", Operating Temperature="-40°C ~ 125°C", Supplier Part Number 1=445-6378-1-ND, Tolerance=±20%, ComponentLink1Description=Datasheet, ComponentLink1URL=https://product.tdk.com/info/en/catalog/datasheets/inductor_commercial_power_mlp2520_en.pdf?ref_disty=digikey, ComponentLink2Description="DigiKey Link", ComponentLink2URL=http://digikey.com/product-detail/en/tdk-corporation/MLP2520S4R7ST0S1/445-6378-1-ND/2465705, Height - Seated (Max)="0.039\" (1.00mm)", Inductance=4.7µH, LastUpdated="13-Aug-20 11:03:40 AM", Lifecycle Status=Active, Material - Core=Ferrite, Minimum Order=1, Mounting Type="Surface Mount", Package / Case="1008 (2520 Metric)", Packaging=TapeAndReel, Part Number=MLP2520S4R7ST0S1, Part Status=Active, PartId=3467, Price=0.14, Series=MLP, Shielding=Shielded, Size / Dimension="0.098\" L x 0.079\" W (2.50mm x 2.00mm)", Supplier 1=DigiKey, Supplier Device Package="1008 (2520 Metric)", Type=Multilayer
Q1_1 Q1_2 Q1_3 Q1_4 Q2_1 Q2_2 Q2_3 Q2_4 Q3_1 Q3_2 Q3_3 Q3_4 Q4_1 Q4_2 Q4_3 Q4_4 Q5_1 Q5_2 Q5_3 Q5_4 Q6_1 Q6_2 Q6_3 Q6_4: "N-FET"
R1_1 R1_2 R1_3 R1_4 R18_1 R18_2 R18_3 R18_4: library part PCAN0805E2002BST5, "RES SMD 20K OHM 0.1% 1W 0805", Device Package="0805 (2012 Metric)", Manufacturer="Vishay Thin Film", Operating Temperature="-55°C ~ 155°C", Power (Watts)=1W, Resistance="20 kOhms", Supplier Device Package=0805, Supplier Part Number 1=764-1242-1-ND, Temperature Coefficient=±25ppm/°C, Tolerance=±0.1%, ComponentLink1Description=Datasheet, ComponentLink1URL=http://www.vishay.com/docs/60125/pcan.pdf, ComponentLink2Description="DigiKey Link", ComponentLink2URL=http://digikey.com/product-detail/en/vishay-thin-film/PCAN0805E2002BST5/764-1242-1-ND/6003316, Composition="Thin Film", Features="Flame Proof, Moisture Resistant, Safety", Height - Seated (Max)="0.018\" (0.46mm)", LastUpdated="8/26/2022 12:02:22 PM", Lifecycle Status=Active, Minimum Order=1, Number of Terminations=2, Package / Case="0805 (2012 Metric)", Packaging=TapeAndReel, Part Number=PCAN0805E2002BST5, Part Status=Active, PartId=32096, Price=0.59, Series=PCAN, Size / Dimension="0.080\" L x 0.050\" W (2.03mm x 1.27mm)", Supplier 1=DigiKey
R2 R3_1 R3_2 R3_3 R3_4 R4_1 R4_2 R4_3 R4_4 R5_1 R5_2 R5_3 R5_4 R6_1 R6_2 R6_3 R6_4 R7_1 R7_2 R7_3 R7_4 R8_1 R8_2 R8_3 R8_4 R9_1 R9_2 R9_3 R9_4 R10_1 R10_2 R10_3 R10_4 R11_1 R11_2 R11_3 R11_4 R12_1 R12_2 R12_3 R12_4 R13_1 R13_2 R13_3 R13_4 R14_1 R14_2 R14_3 R14_4 R15_1 R15_2 R15_3 R15_4 R16_1 R16_2 R16_3 R16_4 R17_1 R17_2 R17_3 R17_4 R19 R20_1 R20_2 R20_3 R20_4 R21_1 R21_2 R21_3 R21_4 R22_1 R22_2 R22_3 R22_4: library part RK73H1ETTP1432F, "RES 14.3K OHM 1% 1/10W 0402", Device Package="0402 (1005 Metric)", Manufacturer="KOA Speer Electronics, Inc.", Operating Temperature="-55°C ~ 155°C", Power (Watts)="0.1W, 1/10W", Ratings=AEC-Q200, Resistance="14.3 kOhms", Supplier Device Package=0402, Supplier Part Number 1=2019-RK73H1ETTP1432FCT-ND, Temperature Coefficient=±100ppm/°C, Tolerance=±1%, ComponentLink1Description=Datasheet, ComponentLink1URL=http://www.koaspeer.com/catimages/Products/RK73H/RK73H.pdf, ComponentLink2Description="DigiKey Link", ComponentLink2URL=https://www.digikey.com/en/products/detail/koa-speer-electronics-inc/RK73H1ETTP1432F/9844351, Composition="Thick Film", Features="Automotive AEC-Q200, Moisture Resistant", Height - Seated (Max)="0.016\" (0.40mm)", LastUpdated="8/14/2022 9:23:49 PM", Lifecycle Status=Active, Minimum Order=1, Number of Terminations=2, Package / Case="0402 (1005 Metric)", Packaging=CutTape, Part Number=RK73H1ETTP1432F, Part Status=Active, PartId=10193, Price=0.01, Series=RK73H, Size / Dimension="0.039\" L x 0.020\" W (1.00mm x 0.50mm)", Supplier 1=DigiKey
TP1_1 TP1_2 TP1_3 TP1_4 TP2_1 TP2_2 TP2_3 TP2_4: library part "TP 0.8mm", "Test point"
U1: library part MIC5504-3.3YM5, "3.3V LDO"
U1_1 U1_2 U1_3 U1_4: "3 Phase Gate Driver 1.5-2.2A", Package="VSON-10 Texas Instruments", Availability=Warning, DigiKey-Purchase-URL=https://snapeda.com/shop?store=DigiKey&id=3625400, MF="Texas Instruments", MP=UCC27282DRCR, Price=None, SnapEDA_Link=https://www.snapeda.com/parts/UCC27282DRCR/Texas%20Instruments/view-part/3625400/?ref=snap, Texas_Instruments-Purchase-URL=https://snapeda.com/shop?store=Texas+Instruments&id=3625400
U2: library part AP63205WU-7, "5V fixed step down Buck"
U3_1 U3_2 U3_3 U3_4: "MCU UFQFPN-32"
U4_1 U4_2: "Current sense amplifier 4 channel"

## Free pads (board coordinates)
  rect 2.8x2.4 smd: 1(-15,-2.2) 1(-15,2.2) 1(15,-2.2) 1(15,2.2) 2(-15,-5.9) 2(15,-5.9) 2(15,5.9) 3(-15,-9.6) 3(-15,5.9) 3(-15,9.6) 3(15,-9.6) 3(15,9.6)
  round 1.524 hole 2.2: 1(-13,-13) 1(-13,13) 1(13,-13) 1(13,13)
  rect 4x3 smd: 2(-5.8,-14.8) 2(5.8,-14.8)

## Via types
v1: diameter 0.45, hole 0.2, Top Layer to Bottom Layer, tented both sides, 198 vias
v2: diameter 0.6, hole 0.3, Top Layer to Bottom Layer, tented both sides, 12 vias